# Altium PCB valve_module.PcbDoc
Units mil, origin at the board's own origin, x right, y up, seen from the top; angles counter-clockwise.
Board outline 3960 x 4855 mil, 4 copper layers (Top Layer, Signal Layer 1, Signal Layer 2, Bottom Layer), stack 30.634 mil thick; 85 components, 77 nets, 394 pads, 290 vias.
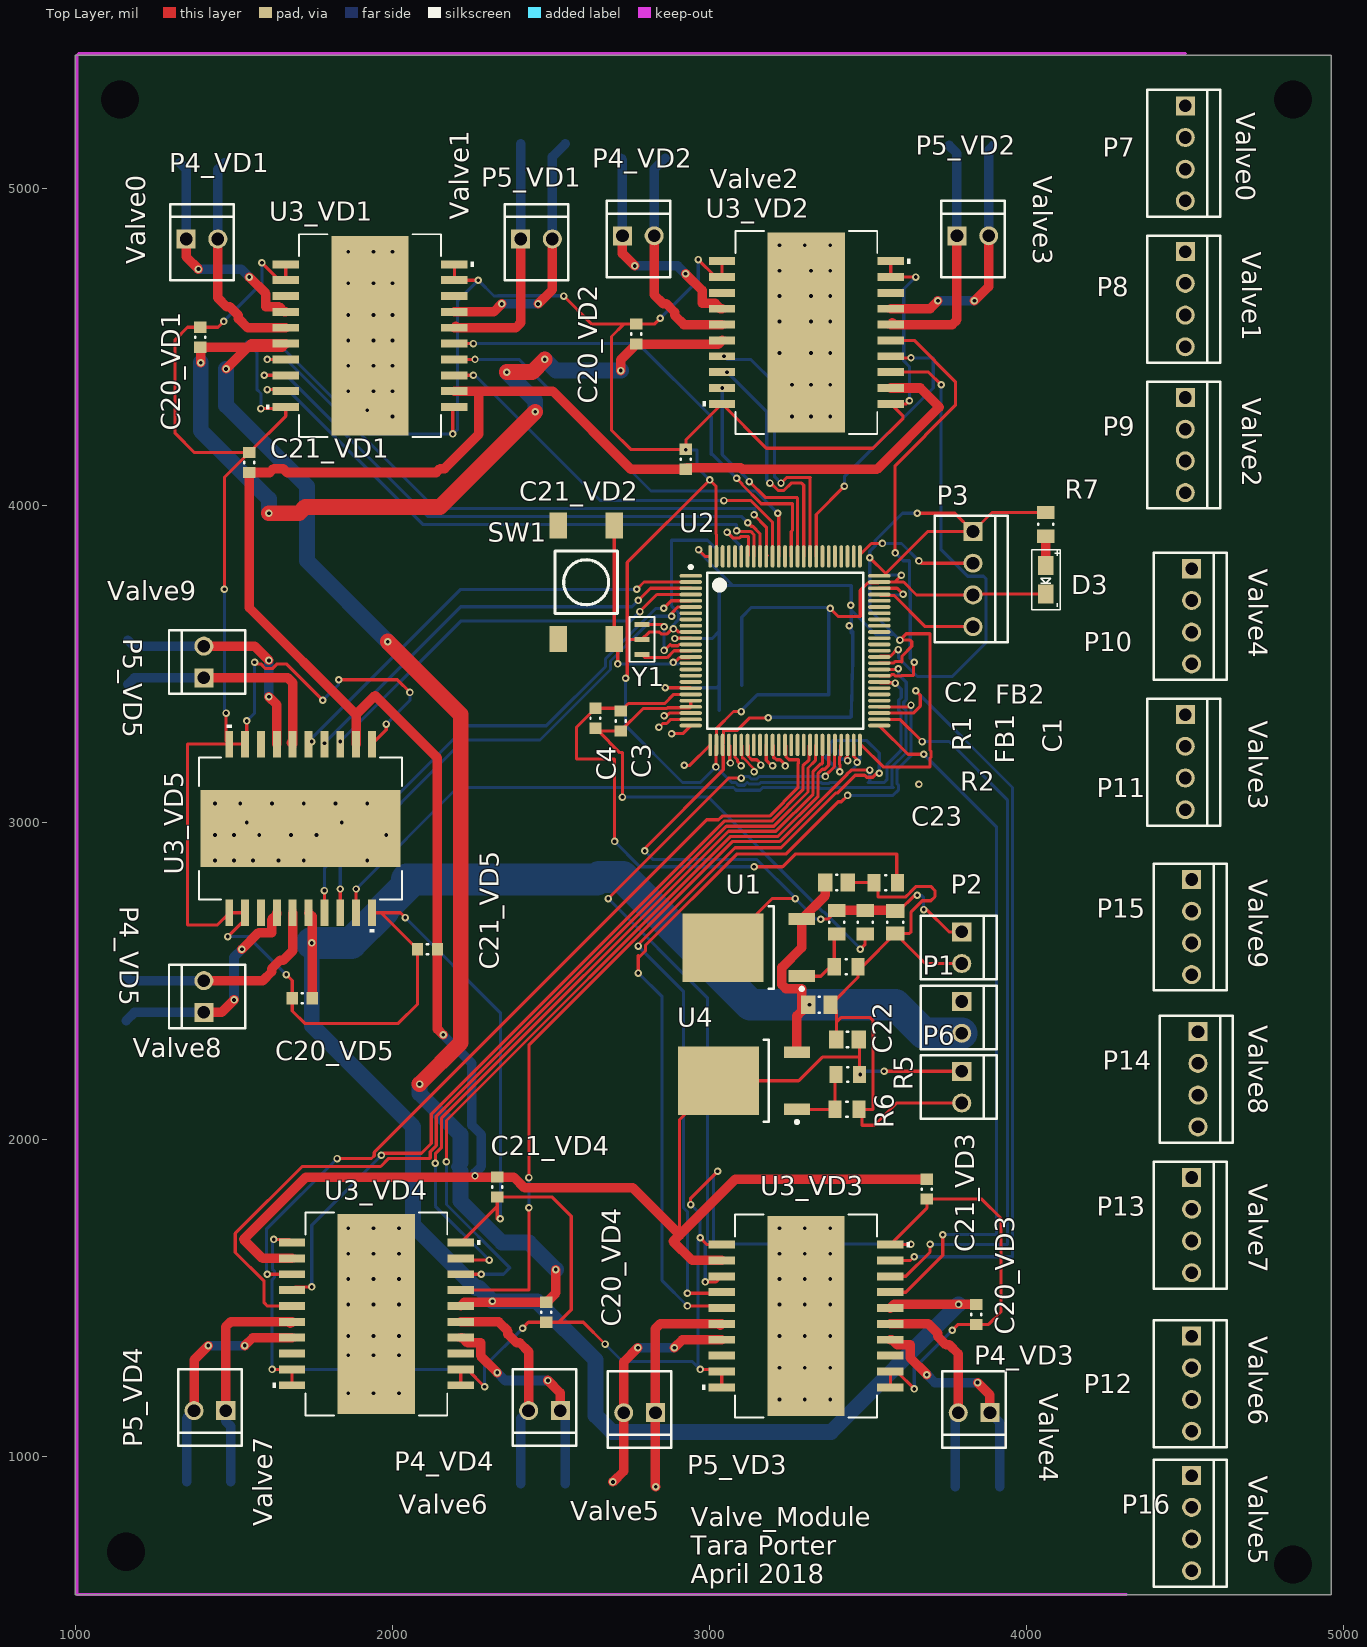
[diagram p0: Top Layer view]
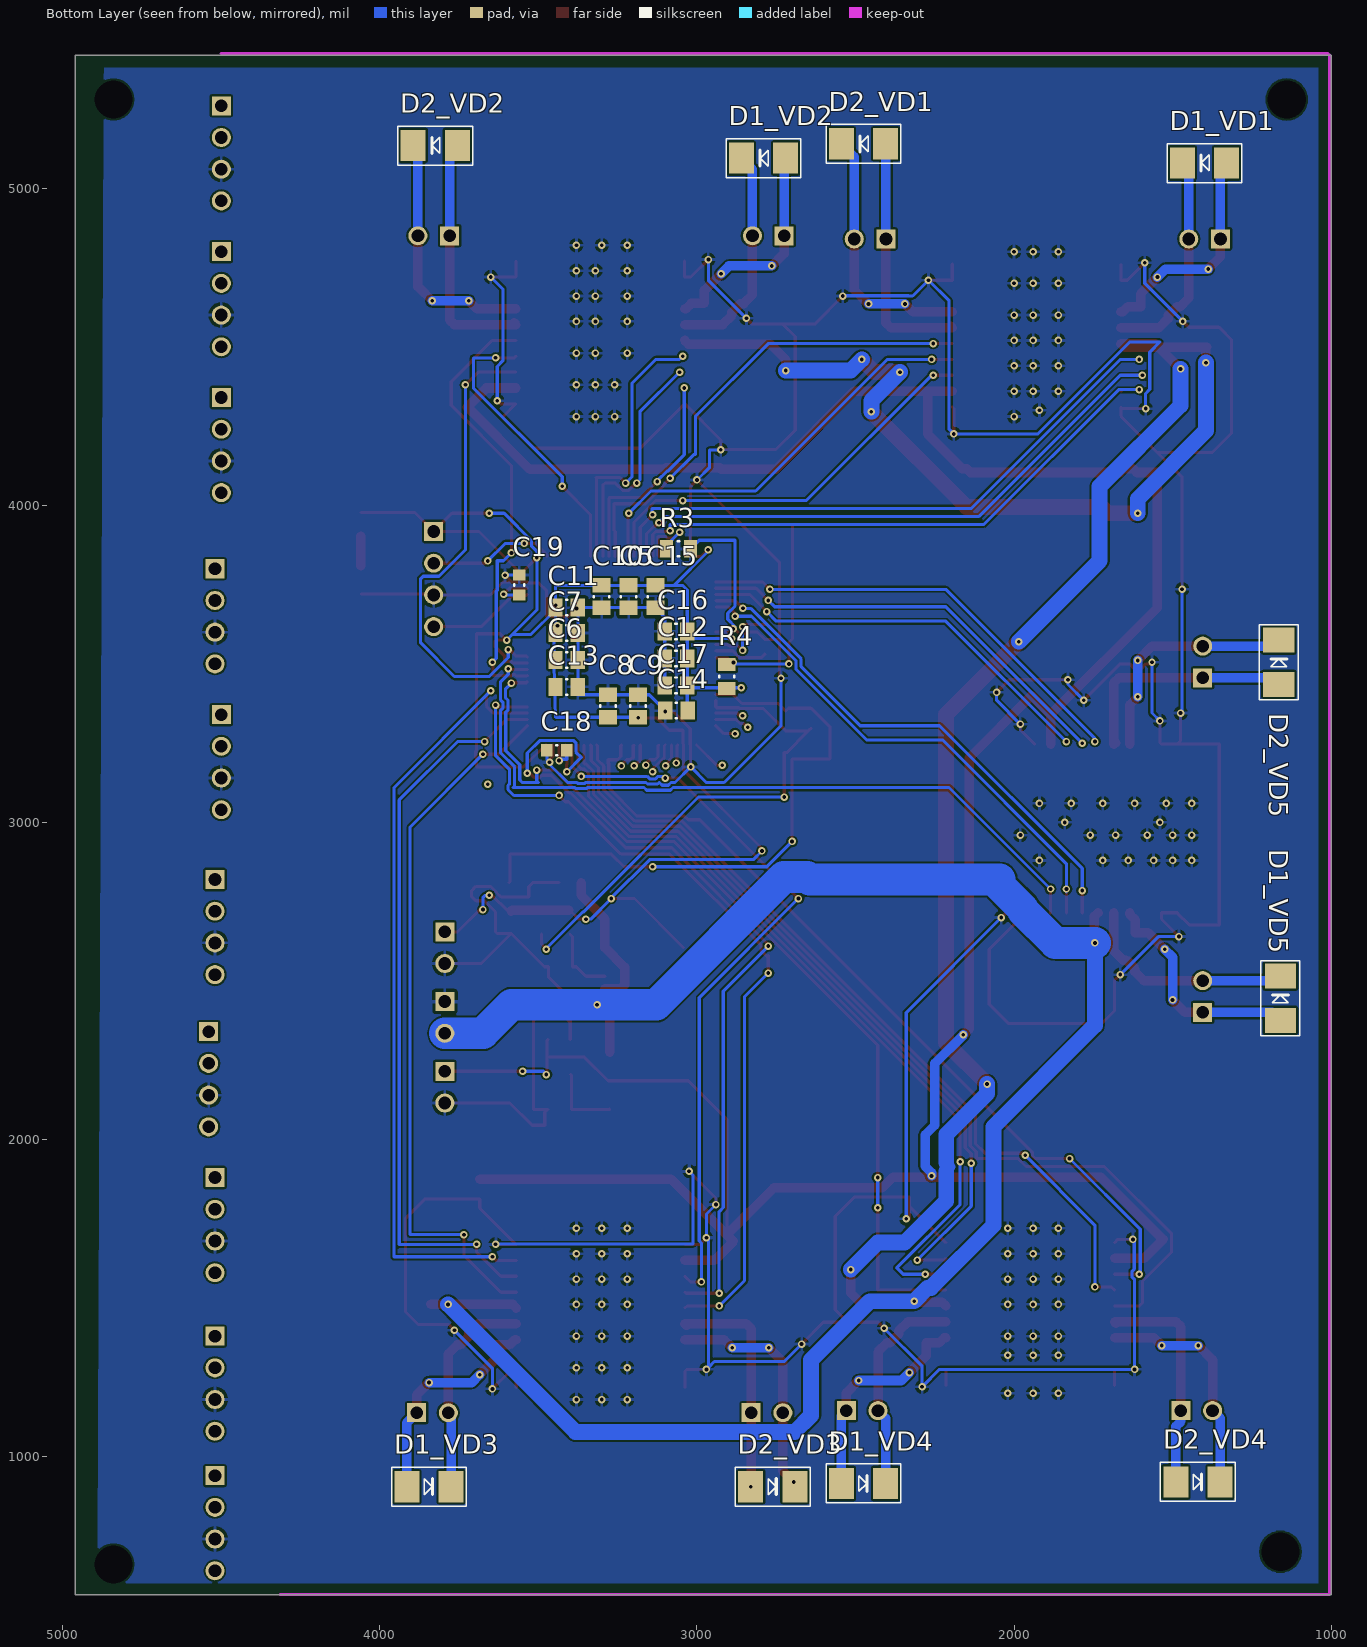
[diagram p1: Bottom Layer view, seen from below]
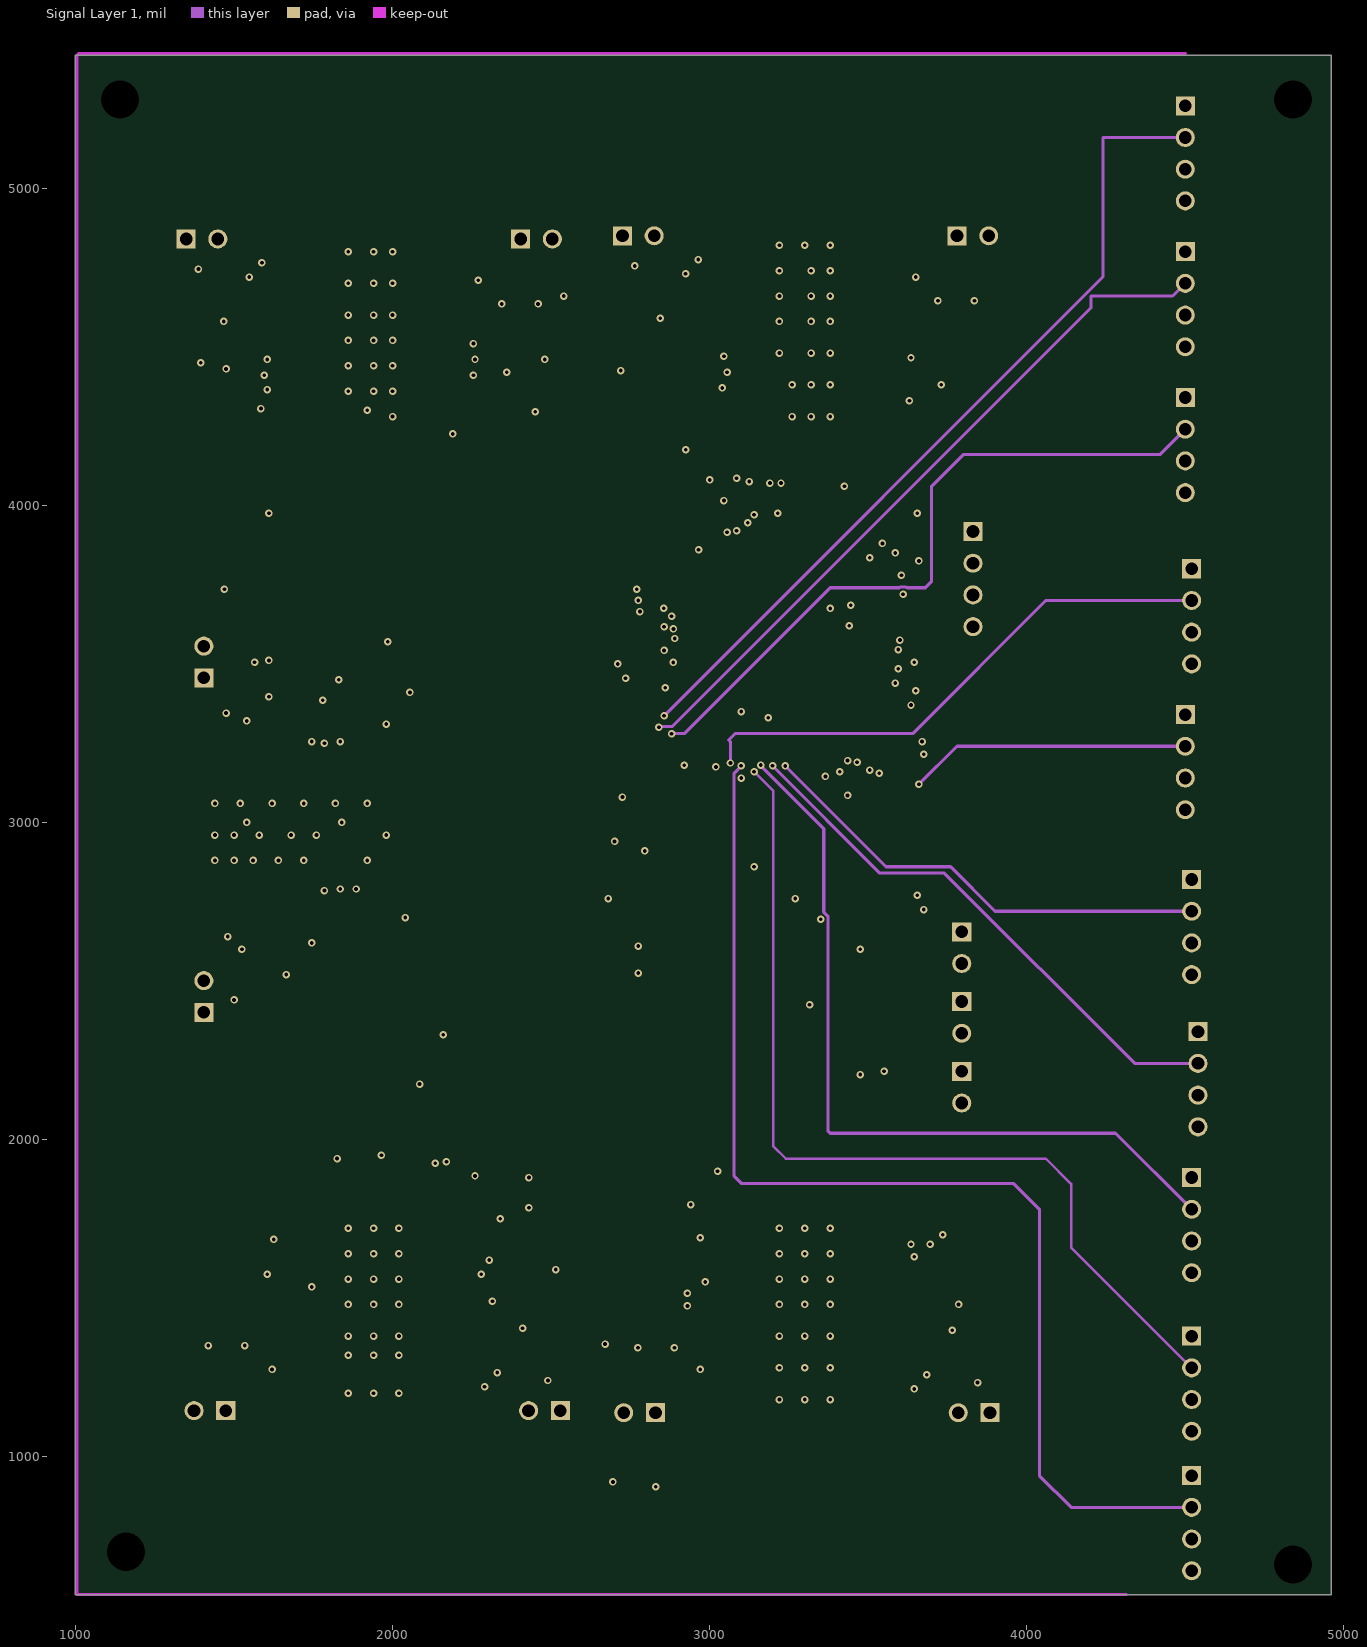
[diagram p2: Signal Layer 1]
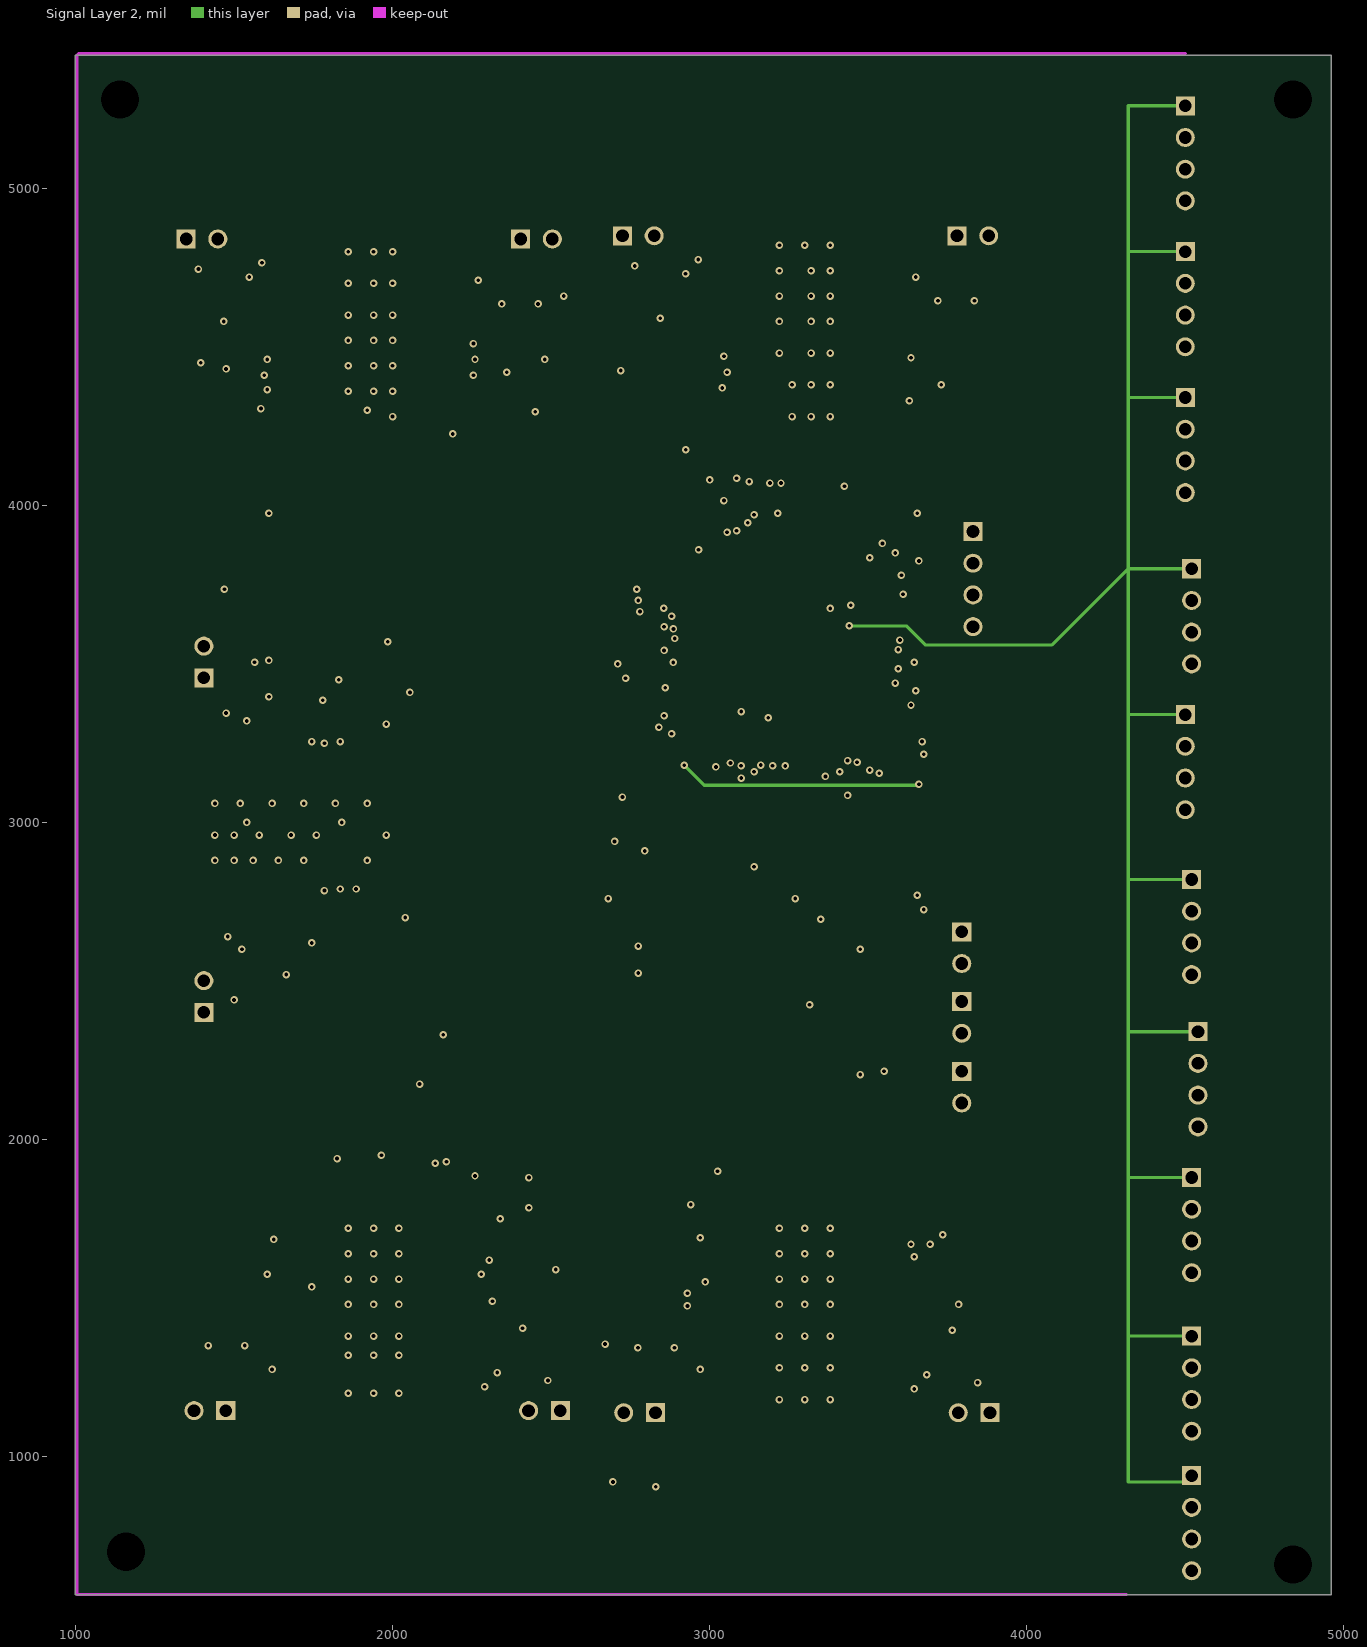
[diagram p3: Signal Layer 2]
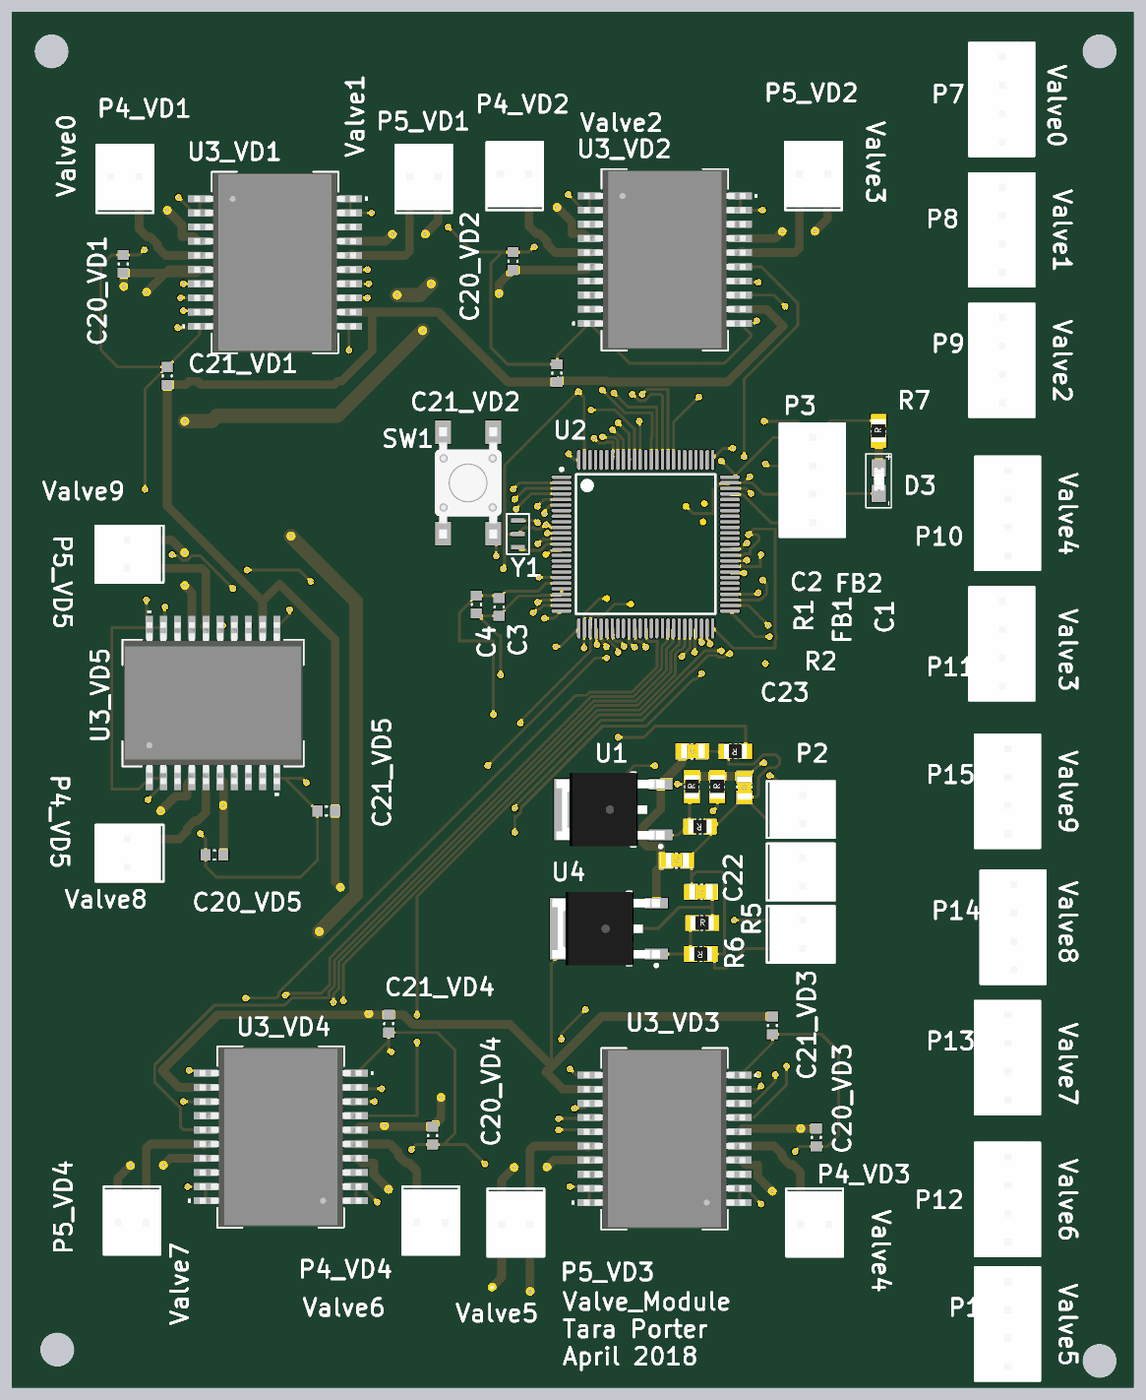
[diagram p4: 3D render of the assembled board from above, using the file's embedded part models]
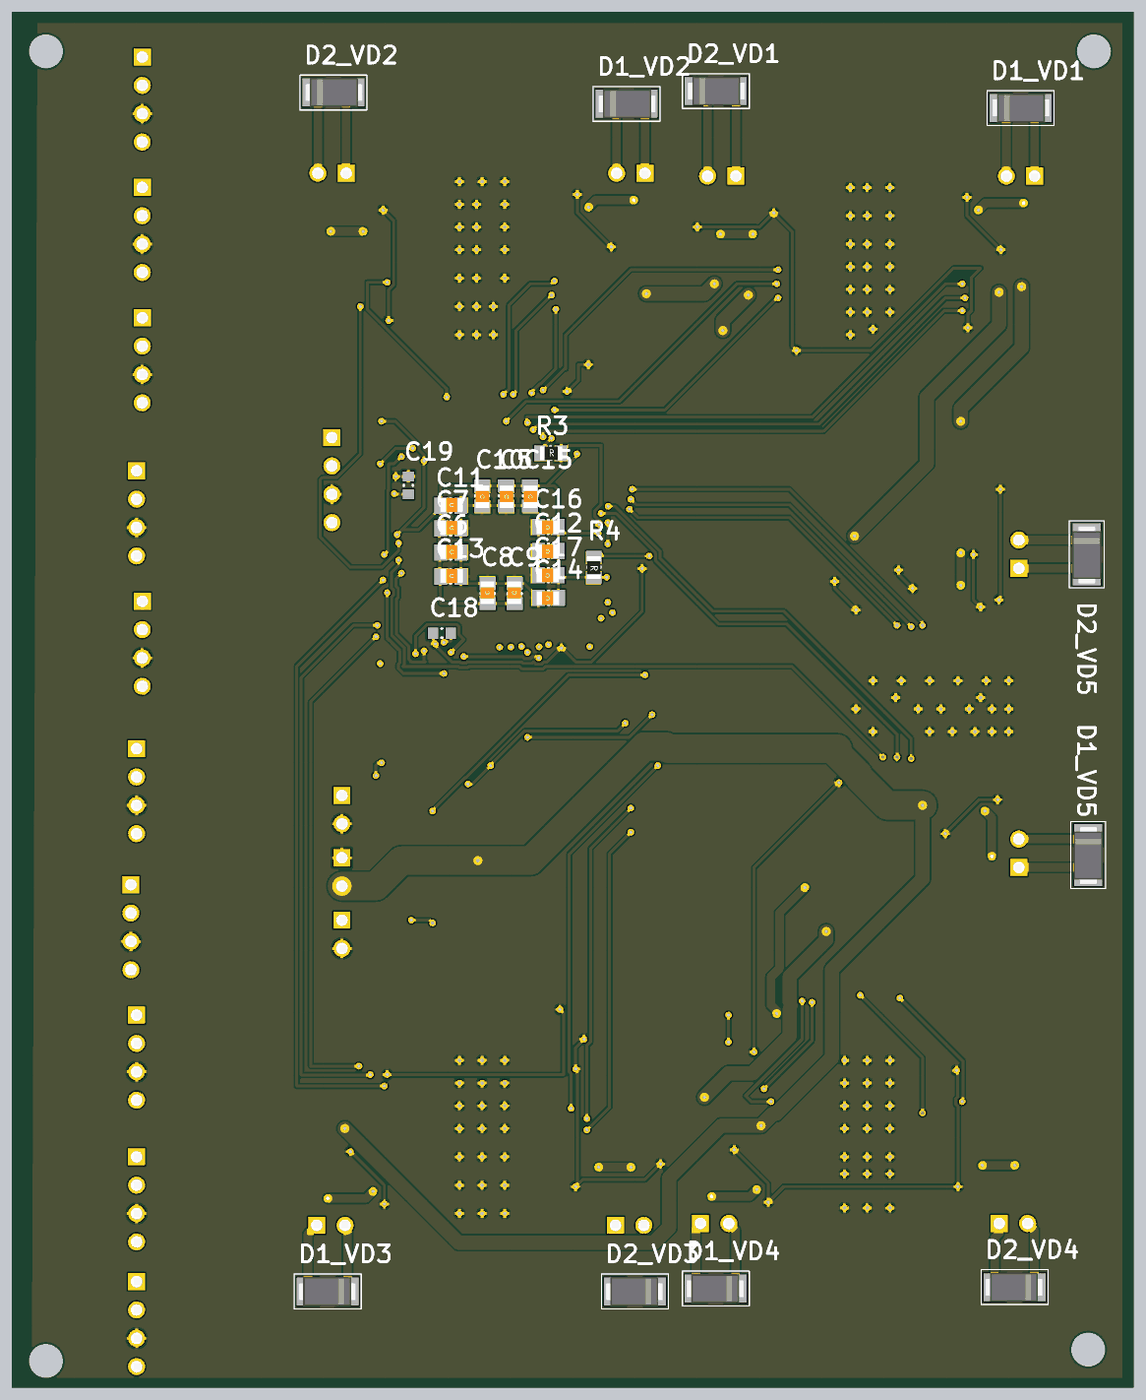
[diagram p5: 3D render of the assembled board from below, using the file's embedded part models]

## Layer stack, top to bottom
Top Solder: solder mask 0.4, Solder Resist, Dk 3.5
Top Layer: signal copper 1.4
Dielectric 1: core 10, FR-4, Dk 4.2
Signal Layer 1: signal copper 1.417
Dielectric 3: prepreg 5, Dk 4.2
Signal Layer 2: signal copper 1.417
Dielectric 2: core 10, Dk 4.2
Bottom Layer: signal copper 1.4
Bottom Solder: solder mask 0.4, Solder Resist, Dk 3.5

## Board outline
1000,565 4960,565 4960,5420 1000,5420

## Design rules (kind name [scope] priority, off if disabled: settings)
BoardOutlineClearance [All] p1: gap=19.68 ignorepadtopadclearanceinfootprint=FALSE
Clearance [All] p1: gap=6 ignorepadtopadclearanceinfootprint=FALSE
HoleSize [All] p1: absolutevalues=TRUE maxlimit=1000 minlimit=11.81 maxpercent=80.000 minpercent=20.000
MinimumAnnularRing [All] p1: minimumring=3
MinimumSolderMaskSliver [All] p1: minsoldermaskwidth=0
PolygonConnect [All] p1: connectstyle=Relief reliefconductorwidth=10 reliefentries=4 polygonreliefangle="90 Angle" airgapwidth=10
RoomDefinition VD5 [InComponentClass('VD5')] p1: confinementstyle=ConfineIn formatcopy=TRUE lockcomponents=FALSE outline 2245,2305 2245,3645 1060,3645 1060,2305
RoomDefinition VD4 [InComponentClass('VD4')] p2: confinementstyle=ConfineIn formatcopy=TRUE lockcomponents=FALSE outline 2625,1985 1285,1985 1285,780 2625,780
RoomDefinition VD3 [InComponentClass('VD3')] p3: confinementstyle=ConfineIn formatcopy=TRUE lockcomponents=FALSE outline 3980,1978.5 2640,1978.5 2640,795 3980,795
RoomDefinition VD2 [InComponentClass('VD2')] p4: confinementstyle=ConfineIn formatcopy=TRUE lockcomponents=FALSE outline 2629,4010 3969,4010 3969,5265 2629,5265
RoomDefinition VD1 [InComponentClass('VD1')] p5: confinementstyle=ConfineIn formatcopy=TRUE lockcomponents=FALSE outline 1253,4000 2605,4000 2605,5250 1253,5250
RoomDefinition PWR [InComponentClass('PWR')] p6: confinementstyle=ConfineIn formatcopy=TRUE lockcomponents=FALSE outline 3975,2000.43 3975,3025 2765.43,3025 2765.43,2000.43
RoutingVias [All] p1: holewidth=11.81 width=23.62 viastyle="Through Hole" minholewidth=11.81 minwidth=23.62 maxholewidth=11.81 maxwidth=23.62
SilkToSilkClearance [All] p1: silktosilkclearance=0
SilkToSolderMaskClearance [IsPad] p1: minsilkscreentomaskgap=0 clearancetoexposedcopper=TRUE
SolderMaskExpansion [All] p1: expansion=4
Width [All] p1: maxlimit=100 minlimit=6 preferedwidth=10
26 further rules are at their usual default settings.

## Classes and differential pairs
channel class valve_schematic: VD1 VD2 VD3 VD4 VD5
net class SOL_B_inD[1..5]: SOL_B_inD1 SOL_B_inD2 SOL_B_inD3 SOL_B_inD4 SOL_B_inD5
net class SOL_B_inC[1..5]: SOL_B_inC1 SOL_B_inC2 SOL_B_inC3 SOL_B_inC4 SOL_B_inC5
net class SOL_A_inD[1..5]: SOL_A_inD1 SOL_A_inD2 SOL_A_inD3 SOL_A_inD4 SOL_A_inD5
net class SOL_A_inC[1..5]: SOL_A_inC1 SOL_A_inC2 SOL_A_inC3 SOL_A_inC4 SOL_A_inC5
net class ENABLEB[1..5]: ENABLEB1 ENABLEB2 ENABLEB3 ENABLEB4 ENABLEB5
net class ENABLEA[1..5]: ENABLEA1 ENABLEA2 ENABLEA3 ENABLEA4 ENABLEA5
component class VD5: C20_VD5 C21_VD5 D1_VD5 D2_VD5 P4_VD5 P5_VD5 U3_VD5
component class VD4: C20_VD4 C21_VD4 D1_VD4 D2_VD4 P4_VD4 P5_VD4 U3_VD4
component class VD3: C20_VD3 C21_VD3 D1_VD3 D2_VD3 P4_VD3 P5_VD3 U3_VD3
component class VD2: C20_VD2 C21_VD2 D1_VD2 D2_VD2 P4_VD2 P5_VD2 U3_VD2
component class VD1: C20_VD1 C21_VD1 D1_VD1 D2_VD1 P4_VD1 P5_VD1 U3_VD1
component class PWR: C1 C2 C22 C23 D3 FB1 FB2 P1 P2 P6 R1 R2 R5 R6 R7 U1 U4
component class micro_schematic: C3 C4 C5 C6 C7 C8 C9 C10 C11 C12 C13 C14 C15 C16 C17 C18 C19 P3 P7 P8 P9 P10 P11 P12 P13 P14 P15 P16 R3 R4 SW1 U2 Y1

## Components (designator, comment, footprint, x,y, rotation, side; value= is the part's Value field where it differs from the comment)
C1 "1uF" C0805 3585.43,2685 r270 top
C2 "0.1uF" C0805 3400.43,2810 r0 top
C3 "100n" C0603 2720,3320 r90 top
C4 "1u" C0603 2640,3328.5 r90 top
C5 "100n" C0805 3215.47,3711.97 r270 bottom
C6 "100n" C0805 3410.91,3512.4 r180 bottom
C7 "100n" C0805 3410.91,3597.4 r180 bottom
C8 "100n" C0805 3280.47,3366.97 r90 bottom
C9 "4u7" C0805 3185.47,3366.97 r90 bottom
C10 "100n" C0805 3300.47,3711.97 r270 bottom
C11 "100n" C0805 3410.91,3677.4 r180 bottom
C12 "100n" C0805 3065.91,3517.4 r0 bottom
C13 "100n" C0805 3410.91,3427.4 r180 bottom
C14 "100n" C0805 3065.04,3352.4 r0 bottom
C15 "100n" C0805 3130.47,3711.97 r270 bottom
C16 "100n" C0805 3065.91,3602.4 r0 bottom
C17 "100n" C0805 3065.91,3432.4 r0 bottom
C18 "2u2" C0603 3441.97,3227.4 r0 bottom
C19 "2u2" C0603 3560.47,3748.9 r90 bottom
C20_VD1 "1 uF" C0603 1393,4530 r90 top (schematic designator C20)
C20_VD2 "1 uF" C0603 2769,4540 r90 top (schematic designator C20)
C20_VD3 "1 uF" C0603 3840,1448.5 r270 top (schematic designator C20)
C20_VD4 "1 uF" C0603 2485,1455 r270 top (schematic designator C20)
C20_VD5 "1 uF" C0603 1715,2445 r180 top (schematic designator C20)
C21_VD1 "1 uF" C0603 1548,4135 r90 top (schematic designator C21)
C21_VD2 "1 uF" C0603 2924,4145 r90 top (schematic designator C21)
C21_VD3 "1 uF" C0603 3685,1843.5 r270 top (schematic designator C21)
C21_VD4 "1 uF" C0603 2330,1850 r270 top (schematic designator C21)
C21_VD5 "1 uF" C0603 2110,2600 r180 top (schematic designator C21)
C22 "1uF" C0805 3435,2315 r180 top
C23 "0.1uF" C0805 3345.87,2425 r0 top
D1_VD1 "824501141" DIODE-SMA 1295,5080 r180 bottom (schematic designator D1)
D1_VD2 "824501141" DIODE-SMA 2685.79,5095 r180 bottom (schematic designator D1)
D1_VD3 "824501141" DIODE-SMA 3949.45,905 r0 bottom (schematic designator D1)
D1_VD4 "824501141" DIODE-SMA 2579.21,915 r0 bottom (schematic designator D1)
D1_VD5 "824501141" DIODE-SMA 1160,2340.79 r270 bottom (schematic designator D1)
D2_VD1 "824501141" DIODE-SMA 2370.55,5140 r180 bottom (schematic designator D2)
D2_VD2 "824501141" DIODE-SMA 3720.79,5135 r180 bottom (schematic designator D2)
D2_VD3 "824501141" DIODE-SMA 2865,905 r0 bottom (schematic designator D2)
D2_VD4 "824501141" DIODE-SMA 1524.45,920 r0 bottom (schematic designator D2)
D2_VD5 "824501141" DIODE-SMA 1165,3400.79 r270 bottom (schematic designator D2)
D3 "LED" 0805LED 4060,3810 r270 top
FB1 "FERRITE" R0805 3490.43,2685 r90 top
FB2 "FERRITE" R0805 3555.43,2810 r180 top
P1 "Molex KK 1x2" "Molex KK 2x1" 3795,2385 r0 top
P2 "Molex KK 1x2" "Molex KK 2x1" 3795,2605 r0 top
P3 "Molex KK 1x4" "Molex KK 4x1" 3830.47,3717.4 r0 top
P4_VD1 "Molex KK 1x2" "Molex KK 2x1" 1399,4840 r90 top (schematic designator P4)
P4_VD2 "Molex KK 1x2" "Molex KK 2x1" 2775,4850 r90 top (schematic designator P4)
P4_VD3 "Molex KK 1x2" "Molex KK 2x1" 3834,1138.5 r270 top (schematic designator P4)
P4_VD4 "Molex KK 1x2" "Molex KK 2x1" 2479,1145 r270 top (schematic designator P4)
P4_VD5 "Molex KK 1x2" "Molex KK 2x1" 1405,2451 r180 top (schematic designator P4)
P5_VD1 "Molex KK 1x2" "Molex KK 2x1" 2454,4840 r90 top (schematic designator P5)
P5_VD2 "Molex KK 1x2" "Molex KK 2x1" 3830,4850 r90 top (schematic designator P5)
P5_VD3 "Molex KK 1x2" "Molex KK 2x1" 2779,1138.5 r270 top (schematic designator P5)
P5_VD4 "Molex KK 1x2" "Molex KK 2x1" 1424,1145 r270 top (schematic designator P5)
P5_VD5 "Molex KK 1x2" "Molex KK 2x1" 1405,3506 r180 top (schematic designator P5)
P6 "Molex KK 1x2" "Molex KK 2x1" 3795,2165 r0 top
P7 "Molex KK 1x4" "Molex KK 4x1" 4500,5060 r0 top
P8 "Molex KK 1x4" "Molex KK 4x1" 4500,4600 r0 top
P9 "Molex KK 1x4" "Molex KK 4x1" 4500,4140 r0 top
P10 "Molex KK 1x4" "Molex KK 4x1" 4520,3600 r0 top
P11 "Molex KK 1x4" "Molex KK 4x1" 4500,3140 r0 top
P12 "Molex KK 1x4" "Molex KK 4x1" 4520,1180 r0 top
P13 "Molex KK 1x4" "Molex KK 4x1" 4520,1680 r0 top
P14 "Molex KK 1x4" "Molex KK 4x1" 4540,2140 r0 top
P15 "Molex KK 1x4" "Molex KK 4x1" 4520,2620 r0 top
P16 "Molex KK 1x4" "Molex KK 4x1" 4520,740 r0 top
R1 "240R" R0805 3400.43,2685 r90 top
R2 "390R" R0805 3430.43,2545 r180 top
R3 "100" R0805 3058.07,3862.4 r180 bottom
R4 "1k" R0805 2905.47,3460 r270 bottom
R5 "240R" R0805 3435.43,2205 r0 top
R6 "536R" R0805 3433.03,2095 r180 top
R7 "2k" R0805 4060,3940 r90 top
SW1 "Tactile Switch" "Tactile Switch" 2610.47,3757.4 r90 top
U1 "LM317" D-PAK 3123.11,2605.24 r180 top
U2 "MC-ARM-STM32F446-LQFP100" STM-LQFP100_N 3237.76,3541.54 r0 top
U3_VD1 "" PowerSO-20 1929,4535 r0 top value=Value (schematic designator U3)
U3_VD2 "" PowerSO-20 3305,4545 r0 top value=Value (schematic designator U3)
U3_VD3 "" PowerSO-20 3304,1443.5 r180 top value=Value (schematic designator U3)
U3_VD4 "" PowerSO-20 1949,1450 r180 top value=Value (schematic designator U3)
U3_VD5 "" PowerSO-20 1710,2981 r90 top value=Value (schematic designator U3)
U4 "LM317" D-PAK 3108.11,2185.24 r180 top
Y1 "CSTCE8M00" "8MHz Ceramic Resonator" 2786.34,3530.16 r90 top

## Footprints (in the part's own frame and the unit in brackets; to place one, negate y for a bottom-side part, rotate by r counter-clockwise, add the part's x,y. Pads: shape width x height; smd on the part's side, far side on the other; paste and mask are expansions set on the pad)
"8MHz Ceramic Resonator" [mm] "8MHz Ceramic Resonator Murata"
  rect 0.4x1.2 smd: 1(0,0) 2(1.2,0) 3(2.4,0)
  silkscreen extent -0.6,-1 3,1
0805LED [mil]
  rect 60x50 smd: A(0,0) K(90,0)
  silkscreen extent -50,-45 140,45, body extent -1,-16 81,20, height 33
C0603 [mm] "Chip Capacitor, Body 1.6x0.8mm, Height 1.0mm, IPC Medium Density"
  rect 0.9x1 smd: 1(-0.8,0) 2(0.8,0)
  silkscreen extent -0.05,-0.4 0.05,0.4, body extent -0.87,-0.48 0.88,0.47, height 1
C0805 [mm] "Chip Capacitor, Body 2.0x1.2mm, Height 0.75mm, IPC Medium Density"
  rect 1.15x1.45 smd: 1(-0.9,0) 2(0.9,0)
  silkscreen extent -0.05,-0.62 0.05,0.63, body extent -1.42,-0.67 1.58,0.73, height 0.93
D-PAK [mm] "D-PAK, 4-Leads, Body 6.1x6.5mm, Pitch 2.28mm, Lead Span 9.7mm, IPC Medium Density"
  rect 2.1x0.95 smd: 1(-4.25,2.28) 3(-4.25,-2.28)
  rect 6.5x5.5 smd: 4(2.05,0)
  silkscreen extent -4.38,-3.3 -1.6,3.43, body extent -4.6,-3.28 5.1,3.3, height 2.3
DIODE-SMA [mm]
  rect 2x2.5 smd: A(-0.875,0) K(-4.425,0)
  silkscreen extent -5.65,-1.58 0.35,1.55, body extent -5.2,-1.3 0,1.3, height 2.4
"Molex KK 2x1" [mil]
  rect 60x60 hole 40: 1(0,50)
  round 60 hole 40: 2(0,-50)
  silkscreen extent -130,-100 110,100, body extent -120,-100 110,100, height 458
"Molex KK 4x1" [mil]
  rect 60x60 hole 40: 1(0,200)
  round 60 hole 40: 2(0,100) 3(0,0) 4(0,-100)
  silkscreen extent -120,-150 110,250, body extent -120,-150 110,250, height 458
PowerSO-20 [mil]
  rect 83x25 smd paste+0 mask+0: 1(-266,225) 2(-266,175) 3(-266,125) 4(-266,75) 5(-266,25) 6(-266,-25) 7(-266,-75) 8(-266,-125) 9(-266,-175) 10(-266,-225) 11(266,-225) 12(266,-175) 13(266,-125) 14(266,-75) 15(266,-25) 16(266,25) 17(266,75) 18(266,125) 19(266,175) 20(266,225)
  rect 244x630 smd paste-314.5 mask+0: EPAD(0,0)
  silkscreen extent -328,-320 328,320, body extent -286,-315 286,315, height 142
R0805 [mm] "Chip Resistor, Body 2.0x1.3mm, IPC Medium Density"
  rect 1.05x1.4 smd: 1(-0.95,0) 2(0.95,0)
  silkscreen extent -0.05,-0.6 0.05,0.6, body extent -1.46,-0.7 1.54,0.7, height 0.53
STM-LQFP100_N [mm] "Thin QFP, 100-Leads, Body 14x14mm, Pitch 0.5mm, IPC Medium Density"
  oval 1.8x0.3 smd: 1(-7.55,6) 2(-7.55,5.5) 3(-7.55,5) 4(-7.55,4.5) 5(-7.55,4) 6(-7.55,3.5) 7(-7.55,3) 8(-7.55,2.5) 9(-7.55,2) 10(-7.55,1.5) 11(-7.55,1) 12(-7.55,0.5) 13(-7.55,0) 14(-7.55,-0.5) 15(-7.55,-1) 16(-7.55,-1.5) 17(-7.55,-2) 18(-7.55,-2.5) 19(-7.55,-3) 20(-7.55,-3.5) 21(-7.55,-4) 22(-7.55,-4.5) 23(-7.55,-5) 24(-7.55,-5.5) 25(-7.55,-6) 51(7.55,-6) 52(7.55,-5.5) 53(7.55,-5) 54(7.55,-4.5) 55(7.55,-4) 56(7.55,-3.5) 57(7.55,-3) 58(7.55,-2.5) 59(7.55,-2) 60(7.55,-1.5) 61(7.55,-1) 62(7.55,-0.5) 63(7.55,0) 64(7.55,0.5) 65(7.55,1) 66(7.55,1.5) 67(7.55,2) 68(7.55,2.5) 69(7.55,3) 70(7.55,3.5) 71(7.55,4) 72(7.55,4.5) 73(7.55,5) 74(7.55,5.5) 75(7.55,6)
  oval 0.3x1.8 smd: 26(-6,-7.55) 27(-5.5,-7.55) 28(-5,-7.55) 29(-4.5,-7.55) 30(-4,-7.55) 31(-3.5,-7.55) 32(-3,-7.55) 33(-2.5,-7.55) 34(-2,-7.55) 35(-1.5,-7.55) 36(-1,-7.55) 37(-0.5,-7.55) 38(0,-7.55) 39(0.5,-7.55) 40(1,-7.55) 41(1.5,-7.55) 42(2,-7.55) 43(2.5,-7.55) 44(3,-7.55) 45(3.5,-7.55) 46(4,-7.55) 47(4.5,-7.55) 48(5,-7.55) 49(5.5,-7.55) 50(6,-7.55) 76(6,7.55) 77(5.5,7.55) 78(5,7.55) 79(4.5,7.55) 80(4,7.55) 81(3.5,7.55) 82(3,7.55) 83(2.5,7.55) 84(2,7.55) 85(1.5,7.55) 86(1,7.55) 87(0.5,7.55) 88(0,7.55) 89(-0.5,7.55) 90(-1,7.55) 91(-1.5,7.55) 92(-2,7.55) 93(-2.5,7.55) 94(-3,7.55) 95(-3.5,7.55) 96(-4,7.55) 97(-4.5,7.55) 98(-5,7.55) 99(-5.5,7.55) 100(-6,7.55)
  silkscreen extent -7.67,-6.25 6.25,6.82, body extent -7,-7 7,7, height 1.6
"Tactile Switch" [mm]
  rect 2.1x1.4 smd: 1(-4.55,-2.25) 1(4.55,-2.25) 2(-4.55,2.25) 2(4.55,2.25)
  silkscreen extent -2.5,-2.5 2.5,2.5, body extent -5,-3 5,3, height 5.12

## Part data
C1 C2 C5 C6 C7 C8 C9 C10 C11 C12 C13 C14 C15 C16 C17 C22 C23: library part C0805, "0805 Capacitor"
C3 C4 C18 C19 C20_VD1 C20_VD2 C20_VD3 C20_VD4 C20_VD5 C21_VD1 C21_VD2 C21_VD3 C21_VD4 C21_VD5: library part C0603, "0603 Capacitor"
D1_VD1 D1_VD2 D1_VD3 D1_VD4 D1_VD5 D2_VD1 D2_VD2 D2_VD3 D2_VD4 D2_VD5: "TVS DIODE 14V 23.2V DO214AC", Supplier Part Number 1=SMCJ120CABTR-ND, Supplier 1=Digi-Key
D3: Manufacturer="OSRAM Opto Semiconductors Inc", Manufacturer Part Number="LS T676-Q1R2-1-Z", Reel=D13
FB1 FB2: "FERRITE BEAD 0805"
P1 P2 P4_VD1 P4_VD2 P4_VD3 P4_VD4 P4_VD5 P5_VD1 P5_VD2 P5_VD3 P5_VD4 P5_VD5 P6: "1x2 Molex KK Connector"
P3 P7 P8 P9 P10 P11 P12 P13 P14 P15 P16: "1x4 Molex KK Connector"
R1 R2 R3 R4 R5 R6 R7: library part R0805, "RESISTOR 0805"
SW1: "TL3301AF160QG"
U1 U4: "Linear Voltage Regulator"
U3_VD1 U3_VD2 U3_VD3 U3_VD4 U3_VD5: library part L298P013TR, "Imported", Built_By=EMA_UL_Team, C="Copyright (C) 2015 Accelerated Designs. All rights reserved", Manufacturer_Part_Number=L298P013TR, RefDes=RefDes, Type=Type, Vendor="ST Microelectronics"
Y1: "8MHz Ceramic Resonator"

## Free pads (board coordinates)
  round 0 hole 120 unplated: 2(1140,5280) 2(1160,700) 2(4840,660) 2(4840,5280)

## Via types
v1: diameter 23.62, hole 11.81, Top Layer to Bottom Layer, 290 vias

## Nets (pads, with @x,y where several pads share a name; then routed paths per layer and width w, separated by ;. In a path a pad name is that pad's centre, name@x,y a point inside that pad or via, vN(x,y) a via of type N, cw(c..) or ccw(c..) an arc to the next point about the centre after c; other vN are vias at no path point)
3V3_AVDD: C3.1 C4.1 FB1.1 U2.21 U2.22 | length 1604.2
  Top Layer w10: C4.1 C4.1@2648.5,3288.5 ; v1(2725,3080) 2725,3220 2717.01,3220 C4.1@2648.5,3288.5 ; U2.21 U2.22 2937.73,3361.59 2867.29,3361.59 2864.84,3359.14 2790.63,3359.14 C3.1 C4.1@2648.5,3288.5 ; v1(3475,2600) 3490.43,2615.43 FB1.1
  Bottom Layer w10: v1(2725,3080) 2995,3080 3357.19,2717.81 3359.45,2717.81 3475,2602.26 v1(3475,2600)
3V3_DVDD: C1.1 C5.1 C6.1 C7.1 C8.1 C9.1 C10.1 C11.1 C12.1 C13.1 C14.1 C15.1 C16.1 C17.1 FB1.2 P2.1 P3.1 P7.1 P8.1 P9.1 P10.1 P11.1 P12.1 P13.1 P14.1 P15.1 P16.1 R1.2 R4.2 R7.2 U1.4 U2.11 U2.19 U2.28 U2.50 U2.61 U2.75 U2.100 | length 14068.7
  Top Layer w9.84: v1(2795,2910) 2795,2917.85 3042.73,3165.58 3042.73,3184.42 3042.73,3194.88 3042.73,3242.46 U2.28 3043.76,3247.15 3043.76,3290.65 3087.26,3290.65 3126.3,3329.68 v1(3185,3329.68) ; v1(2860,3424.68) 2939.25,3424.68 U2.19 ; v1(2890,3580) 2889.09,3580.91 U2.11 ; v1(2965,3860) 2986.22,3838.78 U2.100 ; U1.4 3197.17,2760 v1(3270,2760) ; v1(3350,2695) 3373.03,2695 R1.2 ; U2.50 3477.86,3244.29 3547.15,3175 3695,3175 3695,3202.85 3697.73,3205.58 3697.73,3224.42 3695,3227.15 3695,3595 3620,3595 v1(3600,3575) 3632.27,3575 3637.27,3570 3637.27,3555.12 3606.43,3524.28 3606.43,3506.43 3605.72,3506.43 3604.42,3507.73 3585.58,3507.73 3580.02,3502.17 U2.61 ; C1.1 3590.87,2715 3651.42,2775.55 3655,2771.97 v1(3655,2770) ; v1(3655,3975) 3772.87,3975 P3.1 3890.47,3977.4 R7.2 ; v1(3675,2725) 3685,2725 3755,2655 P2.1
  Top Layer w10: v1(3505,3834.98) 3555,3784.98 3687.43,3917.4 P3.1
  Top Layer w30: R1.2@3405,2722.4 FB1.2 3583.46,2722.4 C1.1
  Signal Layer 2 w9.84: v1(3440,3620) 3620,3620 3680,3560 4080,3560 4320,3800 ; P11.1 4320,3340 ; P9.1 4320,4340 ; P8.1 4320,4800 ; P7.1 4320,5260 4320,4800 ; P16.1 4500,920 4320,920 4320,1380 ; P12.1 4320,1380 ; P13.1 4320,1880 ; P15.1 4320,2820 ; P10.1 4320,3800 ; P14.1 4320,2340 ; 4320,1380 4320,1880 ; 4320,1880 4320,2340 ; 4320,2340 4320,2820 ; 4320,2820 4320,3340 ; 4320,3340 4320,3800 ; 4320,3800 4320,4340 ; 4320,4340 4320,4800
  Bottom Layer w9.84: v1(2795,2910) 2822.27,2882.73 3149.42,2882.73 3270,2762.15 v1(3270,2760) 3335,2695 v1(3350,2695) ; v1(2860,3424.68) 3022.76,3424.68 C17.1 ; v1(2890,3580) 3008.07,3580 C16.1 ; v1(2965,3860) 2965,3854.4 3072,3747.4 C15.1 ; C11.1@3446.34,3670 3523.84,3592.5 3582.5,3592.5 ; v1(3600,3575) 3582.5,3592.5 ; v1(3655,2770) 3667.74,2770 3675,2762.74 v1(3675,2725) ; v1(3655,3975) 3608.17,3975 3522.27,3889.1 3522.27,3872.27 3505,3855 v1(3505,3834.98) 3505,3670 3582.5,3592.5
  Bottom Layer w10: C14.1@3030.47,3353.27 C17.1 C12.1 C16.1 3030.47,3732.4 3045.47,3747.4 3072,3747.4 ; C15.1 C5.1 C10.1 3445.47,3747.4 3446.34,3746.54 C11.1@3446.34,3684.68 ; C9.1 C8.1 3444.61,3331.54 3446.34,3333.27 3448.89,3427.33 3451.2,3512.27 3451.34,3517.4 C7.1@3451.34,3602.4 ; C7.1 C11.1@3446.34,3670
  other v1: 3445,3684.68
+5V_VDD: C21_VD1.1 C21_VD2.1 C21_VD3.1 C21_VD4.1 C21_VD5.1 C22.1 P6.1 R5.2 U3_VD1.12 U3_VD2.12 U3_VD3.12 U3_VD4.12 U3_VD5.12 U4.4 | length 9777.3
  Top Layer w10: 2905,1698.5 2905,1700 2905,2062.83 U4.4 3280.67,2185.24 3355.43,2260 3472.83,2260 ; C22.1 3472.83,2312.6 3472.83,2260 ; R5.2 3472.83,2260 ; v1(3550,2215) P6.1
  Top Layer w30: U3_VD4.12 1590,1625 1530,1685 1726.5,1881.5 C21_VD4.1 2382.1,1881.5 2416.41,1847.19 2757.81,1847.19 2905,1700 ; U3_VD5.12 1885,3340 ; v1(2160,2330) 2141.5,2348.5 C21_VD5.1 2141.5,3203.5 1945,3400 1885,3340 ; U3_VD1.12 2265,4360 ; U3_VD3.12 2945,1618.5 2885,1678.5 2905,1698.5 3081.5,1875 C21_VD3.1 ; U3_VD2.12 3664,4370 3724,4310 3527.5,4113.5 3102.9,4113.5 3098.59,4117.81 2928.31,4117.81 C21_VD2.1 2751.5,4113.5 2505,4360 2265,4360 ; 1885,3340 1548,3677 C21_VD1.1 1612.59,4103.5 1625.09,4116 1654.91,4116 1667.41,4103.5 2137.36,4103.5 2149.86,4116 2164,4116 2271.5,4223.5 2271.5,4353.5 2265,4360
  Bottom Layer w10: v1(3475,2205) 3485,2215 v1(3550,2215)
  Bottom Layer w30: v1(2160,2330) 2250,2240 2250,2045.05 2280,2015.05 2280,1915 2260,1895 v1(2260,1885)
+12V_IN: C2.1 C20_VD1.1 C20_VD2.1 C20_VD3.1 C20_VD4.1 C20_VD5.1 C23.1 P1.2 U1.3 U3_VD1.6 U3_VD2.6 U3_VD3.6 U3_VD4.6 U3_VD5.6 U4.3 | length 13717.4
  Top Layer w30: v1(1395,4450) 1395,4496.5 C20_VD1.1 1651.5,4498.5 U3_VD1.6 1555,4510 v1(1475,4430) ; U3_VD5.6 1746.5,2703.5 C20_VD5.1 ; v1(2085,2175) v1@2085,2180 ; U3_VD4.6 2226.5,1486.5 C20_VD4.1 2515,1516.5 v1(2515,1590) ; v1(2720,4425) 2720,4459.5 C20_VD2.1 3027.5,4508.5 U3_VD2.6 ; U4.3 3275.43,2390 C23.1@3290.43,2405 ; C23.1 C23.1@3290.43,2405 ; C2.1 3365,2769.57 U1.3 3290.43,2605.21 3228.09,2542.87 3228.09,2488.07 3240.4,2475.77 3290.43,2475.77 C23.1@3290.43,2405 ; U3_VD3.6 3581.5,1480 v1(3785,1480) C20_VD3.1
  Top Layer w50: v1(1610,3975) 1705,3975 1725,3995 2150,3995 v1(2450,4295) ; v1(1985,3570) 2215,3340 2215,2305 v1(2085,2175) ; v1(2360,4420) 2440,4420 v1(2480,4460)
  Bottom Layer w30: 2214,1899.6 2200,1913.6 2214,1927.6
  Bottom Layer w50: v1(1395,4450) 1395,4235 1610,4020 v1(1610,3975) ; v1(1475,4430) 1475,4315 1730,4060 1730,3825 v1(1985,3570) ; v1(1745,2620) 1745,2360 2065,2040 2065,1729.46 2262.27,1532.19 2272.81,1532.19 v1(2315,1490) 2455,1490 2640,1305 2640,1130 2692.5,1077.5 3382.5,1077.5 v1(3785,1480) ; v1(2085,2175) 2085,2145 2214,2016 2214,1927.6 ; 2214,1899.6 2214,1806 2345,1675 2430,1675 v1(2515,1590) ; v1(2360,4420) 2450,4330 v1(2450,4295) ; v1(2480,4460) 2515,4425 v1(2720,4425)
  Bottom Layer w100: v1(1745,2620) 1870,2620 1972.19,2722.19 1972.19,2728.09 2045,2800.9 2045,2820 2644.1,2820 2651.91,2827.81 2725.92,2827.81 3128.73,2425 v1(3315,2425) 3585,2425 3675,2335 P1.2
AGND: C3.2 C4.2 FB2.1 U2.20 | length 1921.4
  Top Layer w10: v1(2700,2940) 2700,3200 2580,3200 2580,3300 C4.2 2711.5,3360 C3.2 2743.64,3375.14 2858.21,3375.14 2886.81,3403.74 U2.20 ; v1(3140,2860) 3230,2860 3270,2900 3590,2900 3590,2812.83 FB2.1
  Bottom Layer w10: v1(2700,2940) 2780,2860 v1(3140,2860)
DGND: C1.2 C2.2 C5.2 C6.2 C7.2 C8.2 C9.2 C10.2 C11.2 C12.2 C13.2 C14.2 C15.2 C16.2 C17.2 C18.2 C19.2 C20_VD1.2 C20_VD2.2 C20_VD3.2 C20_VD4.2 C20_VD5.2 C21_VD1.2 C21_VD2.2 C21_VD3.2 C21_VD4.2 C21_VD5.2 C22.2 C23.2 D3.K FB2.2 P1.1 P2.2 P3.3 P6.2 P7.3 P8.3 P9.3 P10.3 P11.3 P12.3 P13.3 P14.3 P15.3 P16.3 R2.1 R3.2 R6.1 U2.10 U2.27 U2.49 U2.74 U2.99 U3_VD1.1 U3_VD1.2 U3_VD1.10 U3_VD1.11 U3_VD1.19 U3_VD1.20 U3_VD1.EPAD U3_VD2.1 U3_VD2.2 U3_VD2.10 U3_VD2.11 U3_VD2.19 U3_VD2.20 U3_VD2.EPAD U3_VD3.1 U3_VD3.2 U3_VD3.10 U3_VD3.11 U3_VD3.19 U3_VD3.20 U3_VD3.EPAD U3_VD4.1 U3_VD4.2 U3_VD4.10 U3_VD4.11 U3_VD4.19 U3_VD4.20 U3_VD4.EPAD U3_VD5.1 U3_VD5.2 U3_VD5.10 U3_VD5.11 U3_VD5.19 U3_VD5.20 U3_VD5.EPAD Y1.2 | length 25126.8
  Top Layer w9.84: U3_VD1.2 U3_VD1.1 ; v1(2735,3455) 2740,3460 2740,3575 ; Y1.2 2742.4,3577.4 2740,3575 ; v1(2925,4175) 2925,4206 U3_VD2.10 3179,4180 3515,4180 3610,4275 3610,4281 U3_VD2.11 3620,4320 v1(3630,4330) ; v1(3020,3175) 3020,3243.07 U2.27 3021.22,3295.91 3075,3349.68 v1(3100,3349.68) ; U2.99 3021.22,3908.46 3020,3909.68 3020,4060 v1(3000,4080) 2740,3820 2740,3575 ; U3_VD2.2 U3_VD2.1 ; v1(3380,3674.68) 3405,3649.68 3475,3649.68 3475,3731.71 3498.5,3755.21 3532.14,3755.21 U2.74 3583.39,3758.07 ; U2.49 3454.29,3207.86 3465,3197.15 v1(3465,3189.68) ; U3_VD2.20 U3_VD2.19 v1(3650,4720) ; v1(3605,3779.68) 3583.39,3758.07 ; D3.K 3833.07,3720 P3.3 3652.28,3717.4 3611.61,3758.07 3583.39,3758.07
  Top Layer w10: v1(1468,4580) 1449.5,4561.5 C20_VD1.2 1353.38,4561.5 1314.31,4522.43 1314.31,4226.81 1374.63,4166.5 C21_VD1.2 ; v1(1470,3735) 1470,4088.5 C21_VD1.2 ; v1(1475,3345) 1475,3257 U3_VD5.20 ; v1(1480,2640) 1535,2695 U3_VD5.2 U3_VD5.1 1485,2714 1448,2677 1353,2677 1353,3247 U3_VD5.20 ; v1(1540,3320) 1540,3252 U3_VD5.19 U3_VD5.20 ; v1(1565,3505) 1560,3500 1584.23,3500 1599.23,3485 1620.77,3485 1635.77,3500 1665,3500 v1(1780,3385) ; v1(1585,4305) 1658,4305 U3_VD1.10 1663,4281.5 C21_VD1.2 ; v1(1588,4765) 1643,4710 U3_VD1.2 ; v1(1620,1275) U3_VD4.19 U3_VD4.20 ; v1(1625,1685) 1673,1685 U3_VD4.11 ; v1(1665,2520) 1683.5,2501.5 C20_VD5.2 1683.5,2405.38 1722.57,2366.31 2018.19,2366.31 2078.5,2426.63 C21_VD5.2 1963.5,2715 ; v1(1830,3450) 2015,3450 v1(2055,3410) ; U3_VD5.10 1963.5,2715 ; U3_VD5.11 1980,3292 v1(1980,3310) ; v1(2040,2700) 2025,2715 1963.5,2715 ; v1(2190,4225) 2190,4305 U3_VD1.11 ; U3_VD1.20 U3_VD1.19 v1(2270,4710) ; U3_VD4.1 U3_VD4.2 2235,1275 v1(2290,1220) ; U3_VD4.10 2330,1790 ; v1(2340,1750) 2330,1750 2330,1790 ; v1(2410,1405) 2428.5,1423.5 C20_VD4.2 2524.62,1423.5 ; v1(2540,4660) 2628.5,4571.5 2729.38,4571.5 ; v1(2670,1355) 2601.5,1423.5 2524.62,1423.5 ; Y1.2 2808.94,3600 2841.48,3600 2846.89,3594.59 2865.79,3594.59 v1@2879.01,3607.81 ; v1(2844,4590) 2825.5,4571.5 C20_VD2.2 2729.38,4571.5 ; v1@2894.45,3607.81 2902.26,3600 2939.92,3600 U2.10 ; C21_VD2.2 2750.63,4176.5 2690.31,4236.81 2690.31,4532.43 2729.38,4571.5 ; v1(2940,1795) 2940,1815 v1(3025,1900) ; v1(2964,4775) 3019,4720 U3_VD2.2 ; v1(2970,1275) 3031.5,1275 U3_VD3.19 U3_VD3.20 ; v1(2970,1690) 2991.5,1668.5 U3_VD3.11 ; C22.2 3399.57,2369.13 ; C2.2 FB2.2 3530.43,2797.6 3530.43,2765 3618.35,2765 3632.19,2778.84 3632.19,2779.45 3651.1,2798.36 3697.26,2798.36 3710.62,2785 3710.62,2766.1 3697.26,2752.74 3670.48,2752.74 3635.43,2717.69 3635.43,2655 3630,2649.57 C1.2 ; U3_VD3.1 U3_VD3.2 3590,1268.5 v1(3645,1213.5) ; v1(3635,1670) 3633.5,1668.5 U3_VD3.10 3685,1783.5 C21_VD3.2 3858.37,1812.01 3918.69,1751.69 3918.69,1456.07 3879.62,1417.01 C20_VD3.2 3783.5,1417.01 v1(3765,1398.5) ; P6.2 3590,2115 3520,2045 3480,2045 3480,2085.43 R6.1 3515.43,2095 3515.43,2375 3505.43,2385 3415.43,2385 3399.57,2369.13 ; P2.2 3680,2555 C1.2 ; 2330,1790 C21_VD4.2 2503.37,1818.5 2563.69,1758.19 2563.69,1462.57 2524.62,1423.5 ; 3399.57,2369.13 3399.57,2406.73 C23.2 3467.83,2511.54 R2.1 3480.87,2545 C1.2
  Bottom Layer w9.84: v1(2735,3455) 2735,3305 2914.16,3125.84 2970.84,3125.84 v1(3020,3175) 3069.16,3125.84 3082.01,3125.84 3090.58,3117.27 3109.42,3117.27 3117.99,3125.84 3119.38,3125.84 3123.96,3121.27 3156.04,3121.27 3160.62,3125.84 3352.01,3125.84 3355.58,3122.27 3374.42,3122.27 3377.99,3125.84 3407.99,3125.84 3465,3182.85 v1(3465,3189.68) 3473.46,3198.15 C18.2 ; v1(2885.96,3610) 2885.96,3611.89 2880,3617.85 2902.73,3640.58 2902.73,3659.42 2880,3682.15 2880,3890 2993.07,3890 R3.2 ; v1(2925,4175) 2960,4175 2960,4120 v1(3000,4080) ; C19.2 3561.18,3779.68 v1(3605,3779.68) ; v1(3630,4330) 3630,4437.85 3612.27,4455.58 3612.27,4682.27 v1(3650,4720)
  Bottom Layer w10: v1(1468,4580) 1588,4700 v1(1588,4765) ; v1(1470,3735) 1470,3350 v1(1475,3345) ; v1(1480,2640) 1545,2640 v1(1665,2520) ; v1(1540,3320) 1565,3345 v1(1565,3505) ; v1(1585,4305) 1585,4352.74 1572.19,4365.55 1572.19,4482.81 1540,4515 1635,4515 1925,4225 v1(2190,4225) 2205,4240 2205,4645 v1(2270,4710) 2320,4660 2332.23,4660 2333.23,4661 2539,4661 v1(2540,4660) ; v1(1625,1685) 1621,1681 1621,1591.26 1627.81,1584.45 1627.81,1565.55 1620,1557.74 v1(1620,1275) 2235,1275 v1(2290,1220) 2290,1285 v1(2410,1405) ; v1(1780,3385) 1830,3435 v1(1830,3450) ; v1(1980,3310) 2055,3385 v1(2055,3410) ; v1(2040,2700) 2340,2400 v1(2340,1750) ; v1(2670,1355) 2725,1300 2945,1300 v1@2963.19,1281.81 ; v1(2844,4590) 2964,4710 v1(2964,4775) ; v1(2940,1795) 2970,1765 v1(2970,1690) 2963.19,1683.19 v1@2963.19,1281.81 ; v1(2970,1275) v1@2963.19,1281.81 ; v1(3025,1900) 3012.37,1887.37 3012.37,1670 v1(3635,1670) ; C14.2@3101.34,3353.27 3150.47,3402.4 C9.2 C8.2 3375.47,3402.4 C13.2 C6.2 C7.2 C11.2@3375.47,3674.68 ; C17.2 C12.2 C16.2 3101.34,3647.4 C15.2 3131.34,3677.4 C11.2 ; v1(3645,1213.5) 3645,1278.5 v1(3765,1398.5)
  other v1: 3220,1180 3300,1180 3380,1180 1860,1200 1940,1200 2020,1200 3220,1280 3300,1280 3380,1280 1860,1320 1940,1320 2020,1320 1860,1380 1940,1380 2020,1380 3220,1380 3300,1380 3380,1380 1860,1480 1940,1480 2020,1480 3220,1480 3300,1480 3380,1480 1860,1560 1940,1560 2020,1560 3220,1560 3300,1560 3380,1560 1860,1640 1940,1640 2020,1640 3220,1640 3300,1640 3380,1640 1860,1720 1940,1720 2020,1720 3220,1720 3300,1720 3380,1720 1440,2880 1500,2880 1560,2880 1640,2880 1720,2880 1920,2880 1440,2960 1500,2960 1580,2960 1680,2960 1760,2960 1980,2960 1540,3000 1840,3000 1440,3060 1520,3060 1620,3060 1720,3060 1820,3060 1920,3060 2000,4280 3260,4280 3320,4280 3380,4280 1920,4300 1860,4360 1940,4360 2000,4360 3260,4380 3320,4380 3380,4380 1860,4440 1940,4440 2000,4440 3220,4480 3320,4480 3380,4480 1860,4520 1940,4520 2000,4520 3220,4580 3320,4580 3380,4580 1860,4600 1940,4600 2000,4600 3220,4660 3320,4660 3380,4660 1860,4700 1940,4700 2000,4700 3220,4740 3320,4740 3380,4740 1860,4800 1940,4800 2000,4800 3220,4820 3300,4820 3380,4820
ENABLEA1: U2.92 U3_VD1.8 | length 1910.6
  Top Layer w9.84: v1(1595,4410) U3_VD1.8 ; v1(3120,3945) 3131.13,3933.87 3135.63,3933.87 3159.02,3910.49 U2.92
  Bottom Layer w9.84: v1(1595,4410) 1665,4410 2110,3965 3100,3965 v1(3120,3945)
ENABLEA2: U2.85 U3_VD2.8 | length 758.9
  Top Layer w10: v1(3190,4070) 3192.74,4070 3215.55,4047.19 3234.45,4047.19 3257.26,4070 3290,4070 3296.81,4063.19 U2.85
  Bottom Layer w10: v1(3055,4420) 3180,4295 3180,4080 v1(3190,4070)
ENABLEA3: U2.52 U3_VD3.8 | length 2337.3
  Top Layer w10: U2.52 3600,3325 v1(3670,3255) ; U3_VD3.8 3618.5,1568.5 3695,1645 v1(3695,1670)
  Bottom Layer w10: v1(3670,3255) 3755,3255 3939,3071 3939,1669 3696,1669 v1(3695,1670)
ENABLEA4: U2.45 U3_VD4.8 | length 2486.7
  Top Layer w10: v1(2170,1930) 2170,2060 3066,2956 3215.63,2956 3342.19,3082.56 3342.19,3154.45 3355.55,3167.81 3362.81,3167.81 3375.55,3180.55 U2.45 ; U3_VD4.8 v1(2280,1575)
  Bottom Layer w10: v1(2170,1930) 2170,1795 2370,1595 2350,1575 v1(2280,1575)
ENABLEA5: U2.6 U3_VD5.8 | length 1627.3
  Top Layer w9.84: U3_VD5.8 v1(1835,2790) ; v1(2880,3650) 2880,3660 2899.33,3679.33 U2.6
  Bottom Layer w9.84: v1@1835,2780 v1(1835,2790) 1835,2870 2225,3260 2465,3260 2687.27,3482.27 2687.27,3509.1 2828.17,3650 v1(2880,3650)
ENABLEB1: U2.89 U3_VD1.14 | length 1358.4
  Top Layer w9.84: U3_VD1.14 v1(2260,4460) ; v1(3215,3975) 3218.07,3971.93 U2.89
  Bottom Layer w9.84: v1(2260,4460) 2400,4460 2815,4045 3145,4045 v1(3215,3975)
ENABLEB2: U2.83 U3_VD2.14 | length 915.1
  Top Layer w10: U2.83 3336.18,3971.18 v1(3425,4060) ; U3_VD2.14 3576,4465 v1(3635,4465)
  Bottom Layer w10: v1(3425,4060) 3425,4090 3705,4370 3705,4465 v1(3635,4465)
ENABLEB3: U2.47 U3_VD3.14 | length 2703.9
  Top Layer w10: v1(2775,2610) 2775,2615 3080,2920 3224.89,2920 3397.57,3092.69 3397.83,3092.43 3402.43,3092.43 3459,3149 3488.74,3149 3495.55,3142.19 3514.45,3142.19 3527.26,3155 v1(3535,3155) ; v1(2930,1515) 3034.5,1515 U3_VD3.14 ; v1(3410,3160) 3410,3167.37 3411.24,3168.61 3411.24,3181.86 3409.79,3183.31 3409.79,3205.41 3412.14,3207.76 3412.14,3241.51 U2.47
  Bottom Layer w10: v1(2775,2610) 2917.19,2467.81 2917.19,1785.55 2930,1772.74 v1(2930,1515) ; v1(3410,3160) 3365,3205 3381.76,3221.76 3381.76,3251.64 3388.2,3258.09 3495.74,3258.09 3535,3218.82 v1(3535,3155)
ENABLEB4: U2.42 U3_VD4.14 | length 2584.2
  Top Layer w10: U3_VD4.14 1693,1535 v1(1745,1535) ; v1(1965,1950) 1971.55,1956.55 2091.3,1956.55 2122,1987.25 2122,2079.88 3046.12,3004 3195.75,3004 3294.19,3102.44 3294.19,3178.33 3313.72,3197.86 3313.72,3241.51 U2.42
  Bottom Layer w10: v1(1745,1535) 1745,1730 v1(1965,1950)
ENABLEB5: U2.3 U3_VD5.14 | length 1357.8
  Top Layer w10: v1(2775,3700) 2813.39,3738.39 U2.3
  Bottom Layer w10: v1(1785,3250) 2215,3680 2755,3680 v1(2775,3700)
NetC18_1: C18.1 U2.48 | length 111.5
  Top Layer w9.84: U2.48 3434.61,3209.29 3428.24,3202.93 3428.24,3197.86 3431.1,3195 v1(3435,3195)
  Bottom Layer w9.84: C18.1 3410.47,3199.21 3430.79,3199.21 v1(3435,3195)
NetC19_1: C19.1 U2.73 | length 133.2
  Top Layer w9.84: U2.73 3591.3,3738.39 v1(3610,3719.68)
  Bottom Layer w9.84: C19.1 3607.72,3717.4 v1(3610,3719.68)
NetD1_VD1_A: D1_VD1.A P4_VD1.1 U3_VD1.4 | length 714.2
  Top Layer w30: P4_VD1.1 1349,4784 v1(1388,4745) ; v1(1548,4720) 1600.5,4667.5 1600.5,4626.5 1641.5,4626.5 1658,4610 U3_VD1.4
  Bottom Layer w30: D1_VD1.A 1349,5060.45 P4_VD1.1 ; v1(1388,4745) 1523,4745 v1(1548,4720)
NetD1_VD1_K: D1_VD1.K P4_VD1.2 U3_VD1.5 | length 693.2
  Top Layer w30: P4_VD1.2 1449,4654 1477,4626 1487.05,4626 1514,4599.05 1514,4589 1543,4560 U3_VD1.5
  Bottom Layer w30: P4_VD1.2 1449,5059.79 D1_VD1.K
NetD1_VD2_A: D1_VD2.A P4_VD2.1 U3_VD2.4 | length 713.1
  Top Layer w30: P4_VD2.1 2725,4794 v1(2764,4755) ; v1(2924,4730) 2976.5,4677.5 2976.5,4636.5 3017.5,4636.5 3034,4620 U3_VD2.4
  Bottom Layer w30: D1_VD2.A 2725,5090.24 P4_VD2.1 ; v1(2764,4755) 2899,4755 v1(2924,4730)
NetD1_VD2_K: D1_VD2.K P4_VD2.2 U3_VD2.5 | length 704.3
  Top Layer w30: P4_VD2.2 2825,4664 2853,4636 2863.05,4636 2890,4609.05 2890,4599 2919,4570 U3_VD2.5
  Bottom Layer w30: P4_VD2.2 2825,5060 D1_VD2.K
NetD1_VD3_A: D1_VD3.A P4_VD3.1 U3_VD3.4 | length 712.4
  Top Layer w30: U3_VD3.4 3575,1368.5 3591.5,1352 3632.5,1352 3632.5,1311 v1(3685,1258.5) ; v1(3845,1233.5) 3884,1194.5 P4_VD3.1
  Bottom Layer w30: v1(3685,1258.5) 3710,1233.5 v1(3845,1233.5) ; P4_VD3.1 3915,1107.5 D1_VD3.A
NetD1_VD3_K: D1_VD3.K P4_VD3.2 U3_VD3.5 | length 682
  Top Layer w30: U3_VD3.5 3690,1418.5 3719,1389.5 3719,1379.45 3745.95,1352.5 3756,1352.5 3784,1324.5 P4_VD3.2
  Bottom Layer w30: D1_VD3.K 3775.24,1129.74 P4_VD3.2
NetD1_VD4_A: D1_VD4.A P4_VD4.1 U3_VD4.4 | length 702.6
  Top Layer w30: U3_VD4.4 2220,1375 2236.5,1358.5 2277.5,1358.5 2277.5,1317.5 v1(2330,1265) ; v1(2490,1240) 2529,1201 P4_VD4.1
  Bottom Layer w30: v1(2330,1265) 2355,1240 v1(2490,1240) ; P4_VD4.1 2544.76,1129.24 D1_VD4.A
NetD1_VD4_K: D1_VD4.K P4_VD4.2 U3_VD4.5 | length 684.8
  Top Layer w30: U3_VD4.5 2335,1425 2364,1396 2364,1385.95 2390.95,1359 2401,1359 2429,1331 P4_VD4.2
  Bottom Layer w30: D1_VD4.K 2405,1121 P4_VD4.2
NetD1_VD5_A: D1_VD5.A P4_VD5.1 U3_VD5.4 | length 721.8
  Top Layer w30: P4_VD5.1 1461,2401 v1(1500,2440) ; v1(1525,2600) 1577.5,2652.5 1618.5,2652.5 1618.5,2693.5 1635,2710 U3_VD5.4
  Bottom Layer w30: D1_VD5.A 1185.76,2401 P4_VD5.1 ; v1(1500,2440) 1500,2575 v1(1525,2600)
NetD1_VD5_K: D1_VD5.K P4_VD5.2 U3_VD5.5 | length 695.6
  Top Layer w30: P4_VD5.2 1591,2501 1619,2529 1619,2539.05 1645.95,2566 1656,2566 1685,2595 U3_VD5.5
  Bottom Layer w30: D1_VD5.K 1174,2501 P4_VD5.2
NetD2_VD1_A: D2_VD1.A P5_VD1.1 U3_VD1.16 | length 787.7
  Top Layer w30: U3_VD1.16@2200,4565 U3_VD1.16 2389,4560 2404,4575 P5_VD1.1
  Bottom Layer w30: P5_VD1.1 2404,5139 D2_VD1.A
NetD2_VD1_K: D2_VD1.K P5_VD1.2 U3_VD1.17 | length 814.9
  Top Layer w30: U3_VD1.17 2319,4610 v1(2344,4635) ; v1(2459,4635) 2504,4680 P5_VD1.2
  Bottom Layer w30: v1(2344,4635) v1(2459,4635) ; P5_VD1.2 2504,5099.24 D2_VD1.K
NetD2_VD2_A: D2_VD2.A P5_VD2.1 U3_VD2.16 | length 782.5
  Top Layer w30: U3_VD2.16@3576,4575 U3_VD2.16 3765,4570 3780,4585 P5_VD2.1
  Bottom Layer w30: D2_VD2.A 3780,5110.24 P5_VD2.1
NetD2_VD2_K: D2_VD2.K P5_VD2.2 U3_VD2.17 | length 789.2
  Top Layer w30: U3_VD2.17 3695,4620 v1(3720,4645) ; v1(3835,4645) 3880,4690 P5_VD2.2
  Bottom Layer w30: v1(3720,4645) v1(3835,4645) ; P5_VD2.2 3880,5120 D2_VD2.K
NetD2_VD3_A: D2_VD3.A P5_VD3.1 U3_VD3.16 | length 721.2
  Top Layer w30: v1(2830,905) 2829,906 P5_VD3.1 2829,1403.5 2844,1418.5 U3_VD3.16 U3_VD3.16@3033,1413.5
NetD2_VD3_K: D2_VD3.K P5_VD3.2 U3_VD3.17 | length 730.6
  Top Layer w30: v1(2695,920) 2729,954 P5_VD3.2 2729,1298.5 v1(2774,1343.5) ; v1(2889,1343.5) 2914,1368.5 U3_VD3.17
  Bottom Layer w30: v1(2774,1343.5) v1(2889,1343.5)
NetD2_VD4_A: D2_VD4.A P5_VD4.1 U3_VD4.16 | length 718.9
  Top Layer w30: P5_VD4.1 1474,1410 1489,1425 U3_VD4.16 U3_VD4.16@1678,1420
  Bottom Layer w30: P5_VD4.1 1474,1111 1490,1095 D2_VD4.A
NetD2_VD4_K: D2_VD4.K P5_VD4.2 U3_VD4.17 | length 732.8
  Top Layer w30: P5_VD4.2 1374,1305 v1(1419,1350) ; v1(1534,1350) 1559,1375 U3_VD4.17
  Bottom Layer w30: D2_VD4.K 1350.24,1121.24 P5_VD4.2 ; v1(1419,1350) v1(1534,1350)
NetD2_VD5_A: D2_VD5.A P5_VD5.1 U3_VD5.16 | length 735.9
  Top Layer w30: P5_VD5.1 1670,3456 1685,3441 U3_VD5.16 U3_VD5.16@1680,3252
  Bottom Layer w30: D2_VD5.A 1185.76,3456 P5_VD5.1
NetD2_VD5_K: D2_VD5.K P5_VD5.2 U3_VD5.17 | length 745.9
  Top Layer w30: P5_VD5.2 1565,3556 v1(1610,3511) ; v1(1610,3396) 1635,3371 U3_VD5.17
  Bottom Layer w30: D2_VD5.K 1184,3556 P5_VD5.2 ; v1(1610,3396) v1(1610,3511)
NetD3_A: D3.A R7.1 | length 92.6
  Top Layer w30: D3.A R7.1
NetR1_1: R1.1 R2.2 U1.1 | length 220.9
  Top Layer w10: U1.1 3290.91,2515 3350.43,2515 3380.43,2545 R2.2 3393.03,2640.2 R1.1
NetR3_1: R3.1 U2.94 | length 210.8
  Top Layer w9.84: v1(3055,3915) 3072.73,3897.27 3094.42,3897.27 3099.34,3902.19 3122.5,3902.19 3122.5,3841.64 U2.94
  Bottom Layer w9.84: v1(3055,3915) 3095.47,3874.53 R3.1
NetR4_1: R4.1 SW1.1 U2.14 | length 704.4
  Top Layer w9.84: SW1.1@2699.06,3578.27 2710,3567.32 v1(2710,3499.68) ; v1(2885,3504.68) 2890,3504.68 2894.16,3508.84 2894.16,3509.14 2904.01,3518.99 2937.65,3518.99 U2.14
  Top Layer w10: SW1.1@2699.06,3578.27 SW1.1@2699.06,3936.54
  Bottom Layer w9.84: v1(2710,3499.68) R4.1@2890,3499.68 ; v1(2885,3504.68) R4.1@2890,3499.68 ; R4.1@2903.19,3499.68 R4.1@2890,3499.68
NetR5_1: R5.1 R6.2 U4.1 | length 231.4
  Top Layer w10: U4.1 3275.91,2095 R6.2 3395.63,2202.6 R5.1
NetU2_12: U2.12 Y1.3 | length 243.3
  Top Layer w10: Y1.3 2849.09,3624.65 v1(2856.34,3617.4) ; v1(2856.34,3542.4) 2875.16,3561.22 2876.52,3561.22 2880.55,3557.19 2899.45,3557.19 2903.48,3561.22 U2.12
  Bottom Layer w10: v1(2856.34,3542.4) v1(2856.34,3617.4)
NetU2_13: U2.13 Y1.1 | length 167.6
  Top Layer w9.84: Y1.1 2796.81,3519.68 2846.91,3519.68 ; 2846.92,3519.67 2865.75,3519.67 2887.35,3541.27 2940.24,3541.27 U2.13
POT0: P7.2 U2.23 | length 2756.2
  Top Layer w10: v1(2856.33,3336.33) 2856.33,3328 2873.01,3344.68 U2.23
  Signal Layer 1 w10: v1(2856.33,3336.33) 4240,4720 4240,5160 P7.2
POT1: P8.2 U2.24 | length 2372.7
  Top Layer w10: v1(2840,3300) 2852,3312 2864.26,3312 2877.26,3325 U2.24
  Signal Layer 1 w10: v1(2840,3300) 2842.81,3302.81 2882.81,3302.81 4202.63,4622.63 4202.63,4660 4460,4660 P8.2
POT2: P9.2 U2.25 | length 2266.4
  Top Layer w10: v1(2880,3280) 2915.2,3280 U2.25
  Signal Layer 1 w10: v1(2880,3280) 2920,3280 3380,3740 3598.06,3740 3600.55,3742.5 3619.45,3742.5 3621.94,3740 3680,3740 3700,3760 3700,4060 3800,4160 4420,4160 P9.2
POT3: P11.2 U2.26 | length 1765.1
  Top Layer w10: v1(2920,3180) 2937.24,3180 U2.26
  Signal Layer 1 w10: v1(3660,3120) 3780,3240 P11.2
  Signal Layer 2 w10: v1(2920,3180) 2982.81,3117.19 3657.19,3117.19 v1(3660,3120)
POT4: P10.2 U2.29 | length 1776.1
  Top Layer w10: U2.29 3063.37,3241.51 3063.37,3189.45 v1(3065.46,3187.36)
  Signal Layer 1 w10: v1(3065.46,3187.36) 3065.46,3254.54 3060,3260 3080,3280 3640,3280 4060,3700 P10.2
POT5: P16.2 U2.30 | length 3744.8
  Top Layer w10: U2.30 3080.28,3204.8 3088.28,3196.8 3088.28,3191.72 3099.06,3180.94 v1(3099.06,3179.06)
  Signal Layer 1 w10: v1(3099.06,3179.06) 3099.06,3178.84 3100,3177.91 3077.19,3155.1 3077.19,1884.7 3100.95,1860.95 3959.05,1860.95 4040,1780 4040,940 4140,840 P16.2
POT6: P12.2 U2.31 | length 3034.6
  Top Layer w8: U2.31 3103.28,3240.98 3103.28,3202.76 3106.22,3202.76 3140,3168.97 v1(3140,3160)
  Signal Layer 1 w8: v1(3140,3160) 3200,3100 3200,1980 3240,1940 4060,1940 4140,1860 4140,1660 P12.2
POT7: P13.2 U2.32 | length 2581.2
  Top Layer w10: U2.32 3122.43,3241.51 3122.43,3207.76 3132.33,3197.86 3148.89,3197.86 3160.95,3185.8 v1(3160.95,3180.95)
  Signal Layer 1 w10: v1(3160.95,3180.95) 3160.95,3179.05 3360,2980 3360,2717.26 3372.81,2704.45 3372.81,2027.19 3380,2020 4280,2020 P13.2
POT8: P14.2 U2.35 | length 1805.9
  Top Layer w10: U2.35 3178.7,3195.45 3195.82,3178.33 v1(3198.33,3178.33)
  Signal Layer 1 w10: v1(3198.33,3178.33) 3536.67,2840 3740,2840 4340,2240 P14.2
POT9: P15.2 U2.36 | length 1563.8
  Top Layer w10: U2.36 3201.17,3241.51 3201.17,3202.81 3206.12,3202.81 3211.07,3197.86 3222.14,3197.86 3238.02,3181.98 v1(3238.02,3178.02)
  Signal Layer 1 w10: v1(3238.02,3178.02) 3556.04,2860 3760,2860 3900,2720 P15.2
SOL_A_inC1: U2.91 U3_VD1.7 | length 1962
  Top Layer w9.84: v1(1605,4460) U3_VD1.7 ; v1(3140,3970) 3178.7,3931.3 U2.91 U2.91@3181.56,3841.64
  Bottom Layer w9.84: v1(1605,4460) 1665,4460 2135,3990 3142.15,3990 3142.15,3972.15 v1(3140,3970)
SOL_A_inC2: U2.84 U3_VD2.7 | length 867.4
  Top Layer w10: v1(3225,4070) 3242.5,4087.5 3317.5,4087.5 3316.5,4086.5 U2.84
  Bottom Layer w10: v1(3045,4470) 3055,4460 3130,4460 3205,4385 3205,4090 v1(3225,4070)
SOL_A_inC3: U2.51 U3_VD3.7 | length 2235.9
  Top Layer w9.84: U2.51 3625.31,3215 v1(3675,3215) ; U3_VD3.7 3618.5,1518.5 3735,1635 v1(3735,1700)
  Bottom Layer w9.84: v1(3675,3215) 3905,2985 3905,1700 v1(3735,1700)
SOL_A_inC4: U2.58 U3_VD4.7 | length 2920.8
  Top Layer w10: U3_VD4.7 2430,1525 v1(2430,1785) ; v1(2430,1880) 2430,2297.37 3072.63,2940 3222.26,2940 3432.81,3150.55 3432.81,3151.81 3446,3165 v1(3505,3165) ; U2.58 3537.78,3440.33 3584.05,3440.33 v1(3585,3439.38)
  Bottom Layer w10: v1(2430,1785) v1(2430,1880) ; v1(3505,3165) 3505,3130.92 3500,3125.92 3550.92,3125.92 3559.08,3134.08 3559.08,3181.59 3603.16,3225.67 3603.16,3347.18 3596.35,3353.99 3596.35,3386.01 3604.08,3393.74 3604.08,3420.3 v1(3585,3439.38) v1@3579.38,3439.38
SOL_A_inC5: U2.5 U3_VD5.7 | length 1659.3
  Top Layer w9.84: U3_VD5.7 v1(1785,2785) ; v1(2855,3675) 2879.02,3699.02 U2.5
  Bottom Layer w9.84: v1(1785,2785) 1785,2855 2235,3305 2485,3305 2671.43,3491.43 2671.43,3515.66 2830.76,3675 v1(2855,3675)
SOL_A_inD1: U2.93 U3_VD1.9 | length 1864.5
  Top Layer w9.84: v1(1605,4365) 1658,4365 U3_VD1.9 ; v1(3085,3920) 3086.97,3918.03 3129.07,3918.03 3139.33,3907.77 U2.93
  Bottom Layer w9.84: v1(1605,4365) 1670,4365 2095,3940 3085,3940 v1(3085,3920)
SOL_A_inD2: U2.86 U3_VD2.9 | length 689.3
  Top Layer w10: v1(3125,4075) 3175,4025 3275,4025 3277.13,4022.87 U2.86
  Bottom Layer w10: v1(3040,4370) 3040,4160 3092.19,4107.81 3094.45,4107.81 3125,4077.26 v1(3125,4075)
SOL_A_inD3: U2.53 U3_VD3.9 | length 2493.4
  Top Layer w10: U2.53 3641.94,3344.68 3664.08,3366.82 3664.08,3400.92 v1(3650,3415) ; U3_VD3.9 3633.5,1618.5 v1(3645,1630)
  Bottom Layer w10: v1(3645,1630) 3955,1630 3955,3110 v1(3650,3415)
SOL_A_inD4: U2.44 U3_VD4.9 | length 2383
  Top Layer w10: v1(2135,1925) 2135,1955 2154,1974 2154,2066.63 3059.37,2972 3209,2972 3326.19,3089.18 3326.19,3161.08 3348.92,3183.81 3353.81,3183.81 3355.87,3185.87 U2.44 ; U3_VD4.9 2220,1620 v1(2305,1620)
  Bottom Layer w10: v1(2135,1925) 2135,1790 v1(2305,1620)
SOL_A_inD5: U2.60 U3_VD5.9 | length 2385.4
  Top Layer w9.84: U3_VD5.9 v1(1885,2790) ; U2.60 3592.48,3482.48 v1(3595,3485)
  Bottom Layer w9.84: v1(1885,2790) 2205,3110 3075.45,3110 3084.02,3101.43 3158.61,3101.43 3167.18,3110 3345.45,3110 3349.02,3106.43 3380.98,3106.43 3384.55,3110 3580,3110 3575,3115 3575,3175 3619.08,3219.08 3619.08,3353.77 3612.27,3360.58 3612.27,3379.42 3620,3387.15 3620,3442.15 3595,3467.15 v1(3595,3485)
SOL_B_inC1: U2.90 U3_VD1.13 | length 1303.4
  Top Layer w9.84: U3_VD1.13 v1(2255,4410) ; v1(3045,4015) 3045.11,4015.11 3130.11,4015.11 3198.39,3946.84 U2.90
  Bottom Layer w9.84: v1(2255,4410) 2260,4410 2655,4015 v1(3045,4015)
SOL_B_inC2: U2.62 U3_VD2.13 | length 1518
  Top Layer w9.84: U2.62 3537.86,3524.71 3571.5,3524.71 3581.35,3534.57 3581.35,3536.35 3590,3545 v1(3595,3545) ; U3_VD2.13 3690,4420 v1(3730,4380)
  Bottom Layer w9.84: v1(3595,3545) 3595,3520 3655,3460 3765,3460 3871.39,3566.39 3871.39,3768.61 3863.52,3776.48 3813.52,3776.48 3730,3860 v1(3730,4380)
SOL_B_inC3: U2.46 U3_VD3.13 | length 2373.4
  Top Layer w10: v1(2680,2760) 3060,3140 v1(3100,3140) ; v1(2986,1551) 3020.5,1551 U3_VD3.13 ; v1(3365,3145) 3365,3147.26 3393.79,3176.05 3393.79,3242.84 U2.46
  Bottom Layer w10: v1(2680,2760) 2992.81,2447.19 2992.81,1680.55 2986,1673.74 v1(2986,1551) ; v1(3100,3140) 3095,3145 3122.74,3145 3130.55,3137.19 3149.45,3137.19 3157.26,3145 v1(3365,3145)
SOL_B_inC4: U2.38 U3_VD4.13 | length 2651
  Top Layer w10: v1(1605,1575) U3_VD4.13 ; v1(1825,1940) 1933.46,1940 1942.19,1948.72 1942.19,1959.45 2990.99,3008.25 3027.74,3008.25 3039.49,3020 3189.12,3020 3278.19,3109.07 3278.19,3184.96 3280,3186.77 3280,3197.86 3250.44,3197.86 3240.54,3207.76 3240.54,3241.51 U2.38
  Bottom Layer w10: v1(1605,1575) 1602.19,1577.81 1602.19,1717.19 v1(1825,1940)
SOL_B_inC5: U2.4 U3_VD5.13 | length 1297.6
  Top Layer w10: v1(2780,3665) 2833.7,3718.7 U2.4
  Bottom Layer w10: v1(1835,3255) 2215,3635 2750,3635 v1(2780,3665)
SOL_B_inD1: U2.87 U3_VD1.15 | length 1514.7
  Top Layer w10: U3_VD1.15 v1(2255,4510) ; v1(3085,4085) 3102.19,4067.81 3102.19,4065.55 3162.74,4005 3261.13,4005 3261.13,3920.76 3257.44,3917.07 U2.87
  Bottom Layer w10: v1(2255,4510) 2775,4510 3005,4280 3005,4159.88 3010.12,4159.88 v1(3085,4085)
SOL_B_inD2: U2.59 U3_VD2.15 | length 1413.2
  Top Layer w10: U2.59 3535.61,3462.19 3569.93,3462.19 3574.3,3466.56 3581.18,3466.56 3585.55,3462.19 3604.45,3462.19 3605.05,3462.8 3642.8,3462.8 3642.8,3502.8 v1(3645,3505) ; U3_VD2.15 3645,4520 3775,4390 3775,4315 3585,4125 v1(3585,3850)
  Bottom Layer w10: v1(3585,3850) 3610,3825 3630,3825 3630,3731.94 3632.81,3729.13 3632.81,3517.19 v1(3645,3505)
SOL_B_inD3: U2.54 U3_VD3.15 | length 2719.9
  Top Layer w10: v1(2775,2525) 2775,2580 2778.69,2576.31 2797.81,2595.44 2797.81,2612.42 3085.39,2900 3240,2900 3405,3065 3415,3065 v1(3435,3085) ; v1(2930,1475) 3031.5,1475 U3_VD3.15 ; U2.54 3629.37,3364.37 v1(3635,3370)
  Bottom Layer w10: v1(2775,2525) 2850,2450 2850,1555 v1(2930,1475) ; v1(3435,3085) 3577.52,3085 3595.92,3103.41 3595.92,3116.59 3590.92,3121.59 3590.92,3165.92 3635,3210 v1(3635,3370)
SOL_B_inD4: U2.43 U3_VD4.15 | length 2957
  Top Layer w10: U3_VD4.15 1605,1475 1595,1485 1595,1552.74 1504,1643.74 1504,1704 1715,1915 1962.26,1915 1987.81,1940.55 2118.29,1940.55 2119,1941.26 2119,1961.63 2138,1980.63 2138,2073.25 3052.75,2988 3202.38,2988 3310.19,3095.81 3310.19,3171.7 3333.4,3194.92 3333.4,3241.51 U2.43
SOL_B_inD5: U2.2 U3_VD5.15 | length 1409.7
  Top Layer w10: v1(2770,3735) 2793.07,3758.07 U2.2
  Bottom Layer w10: v1(1745,3255) 1745,3265 2215,3735 v1(2770,3735)
SWCLK: P3.2 U2.76 | length 402.1
  Top Layer w10: U2.76 3473.98,3843.66 3510,3879.68 v1(3545,3879.68) ; v1(3660,3824.68) 3667.28,3817.4 P3.2
  Bottom Layer w10: v1(3545,3879.68) 3605,3879.68 v1(3660,3824.68)
SWDIO: P3.4 U2.72 | length 337.4
  Top Layer w10: U2.72 3537.78,3715.92 3581.43,3715.92 3679.95,3617.4 P3.4
pads on no net: P7.4 P8.4 P9.4 P10.4 P11.4 P12.4 P13.4 P14.4 P15.4 P16.4 SW1.2 U2.1 U2.7 U2.8 U2.9 U2.15 U2.16 U2.17 U2.18 U2.33 U2.34 U2.37 U2.39 U2.40 U2.41 U2.55 U2.56 U2.57 U2.63 U2.64 U2.65 U2.66 U2.67 U2.68 U2.69 U2.70 U2.71 U2.77 U2.78 U2.79 U2.80 U2.81 U2.82 U2.88 U2.95 U2.96 U2.97 U2.98 U3_VD1.3 U3_VD1.18 U3_VD2.3 U3_VD2.18 U3_VD3.3 U3_VD3.18 U3_VD4.3 U3_VD4.18 U3_VD5.3 U3_VD5.18

## Polygon pours and split planes (outlines as drawn)
DGND on Bottom Layer "DGND_L04_P000" (solid, pour order 0): 4889.96,600 1040,600 1040,5380 4869.96,5380

## Keep-outs
Keep-Out Layer:
  lines w10: 4315,565 1005,565 1005,5420 1010,5425 4500,5425

## Silkscreen, mask and mechanical layers (free items; w line width, h text height)
Top Overlay:
  text "Valve0" at 4660,5240 h60 r270
  text "Valve3" at 4020,5040 h60 r270
  text "Valve2" at 3000,5000 h60
  text "Valve1" at 2240,4900 h60 r90
  text "Valve1" at 4680,4800 h60 r270
  text "Valve0" at 1220,4760 h60 r90
  text "Valve2" at 4680,4340 h60 r270
  text "Valve4" at 4700,3800 h60 r270
  text "Valve9" at 1100,3700 h60
  text "Valve3" at 4700,3320 h60 r270
  text "Valve9" at 4700,2820 h60 r270
  text "Valve8" at 4700,2360 h60 r270
  text "Valve8" at 1180,2260 h60
  text "Valve7" at 4700,1860 h60 r270
  text "Valve6" at 4700,1380 h60 r270
  text "Valve4" at 4040,1200 h60 r270
  text "Valve5" at 4700,940 h60 r270
  text "Valve6" at 2020,820 h60
  text "Valve5" at 2560,800 h60
  text "Valve7" at 1620,780 h60 r90
  text "Valve_Module / Tara Porter / April 2018" at 2940,600 h60
Mechanical 13:
  lines w10: 4315,565 4935,565 4940,565 4940,5420 4935,5425 4500,5425